# Altium PCB LMAT_AMT_V3.PcbDoc (part 1 of 2)
Units mil, origin at the board's own origin, x right, y up, seen from the top; angles counter-clockwise.
Board outline 1437.01 x 1604.33 mil, 4 copper layers (Top Layer, PWR, GND, Bottom Layer), stack 61.89 mil thick; 106 components, 51 nets, 250 pads, 150 vias.
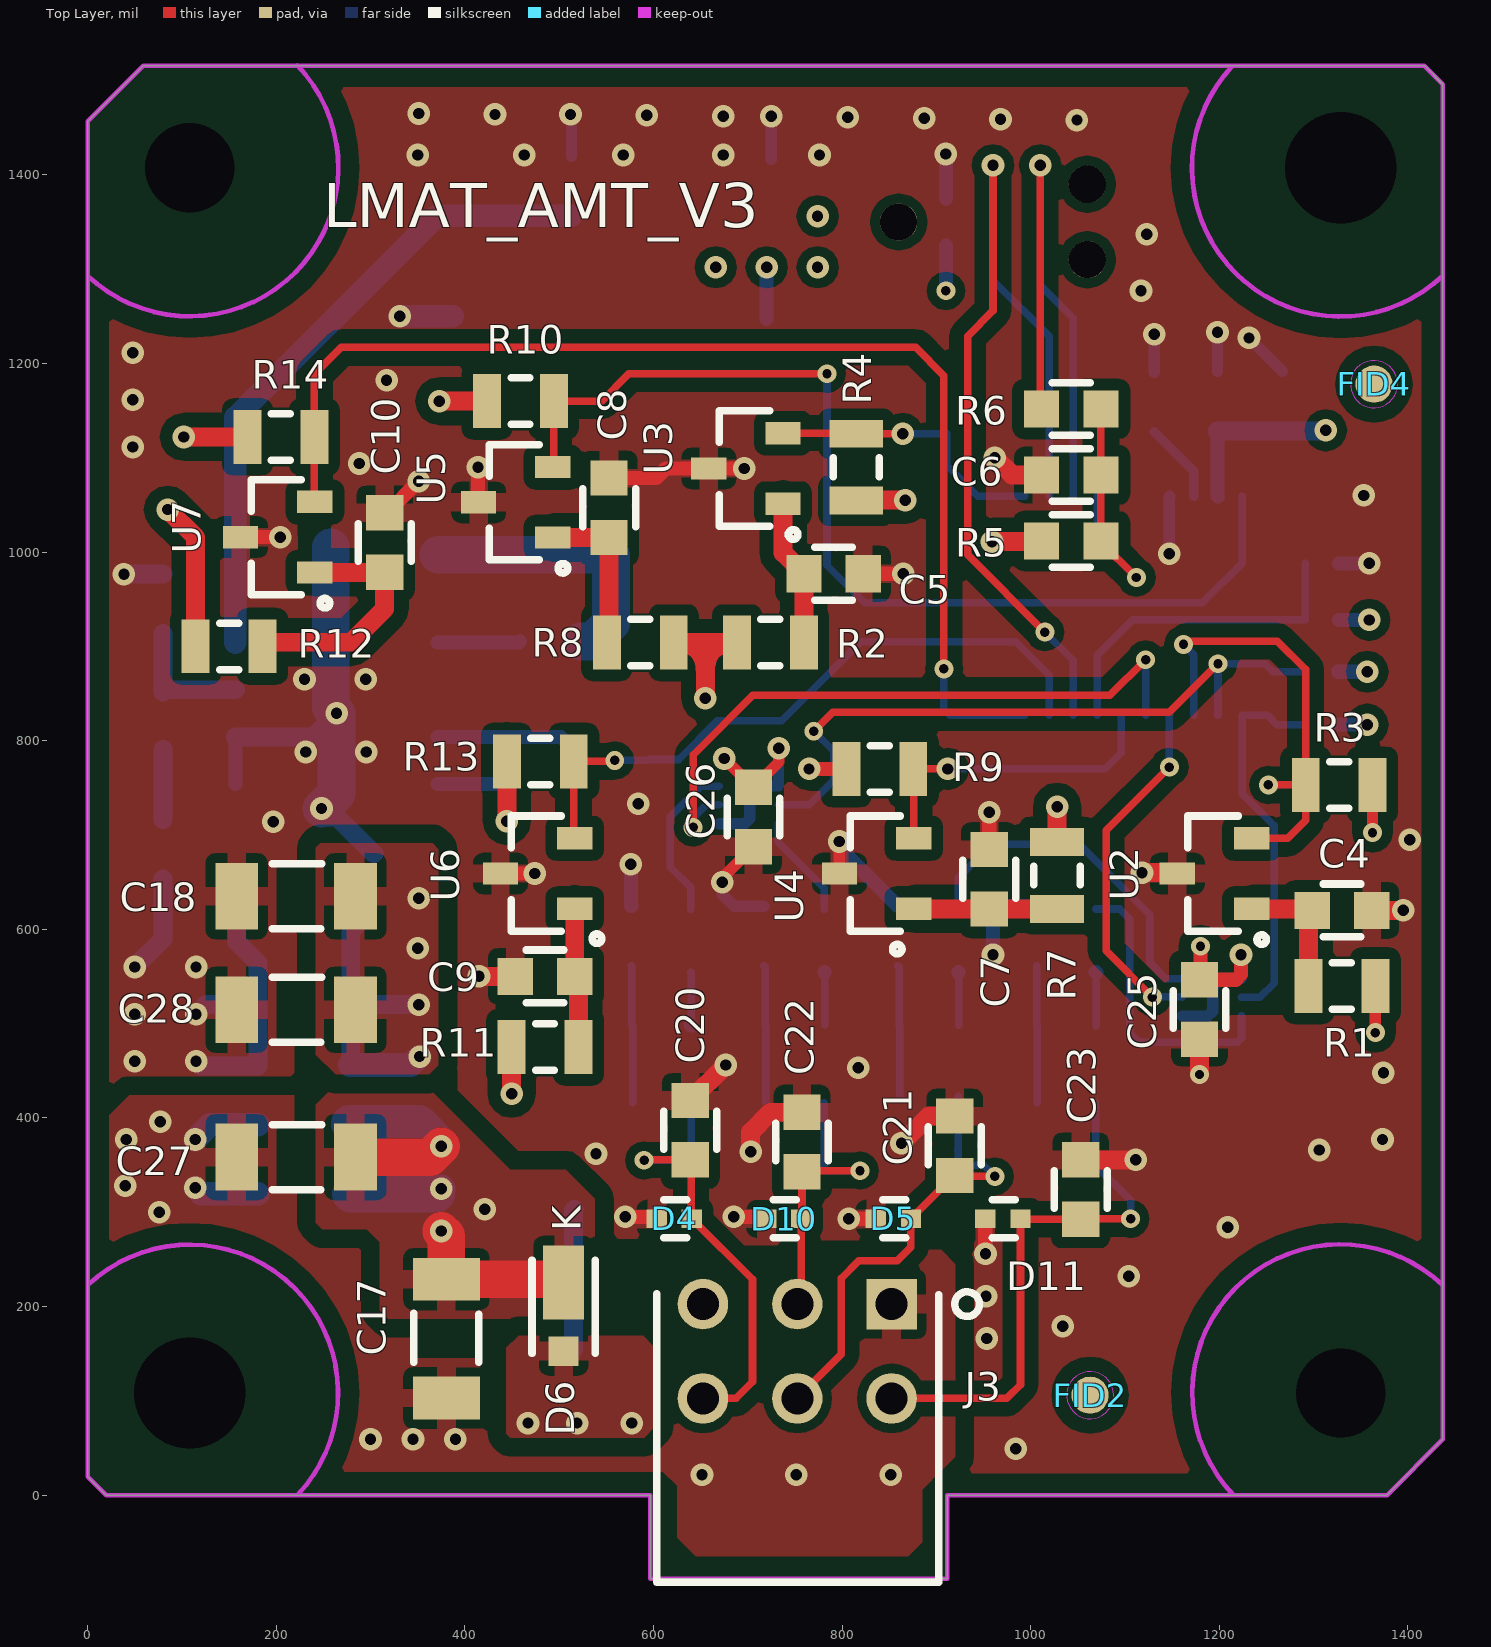
[diagram p0: Top Layer view]
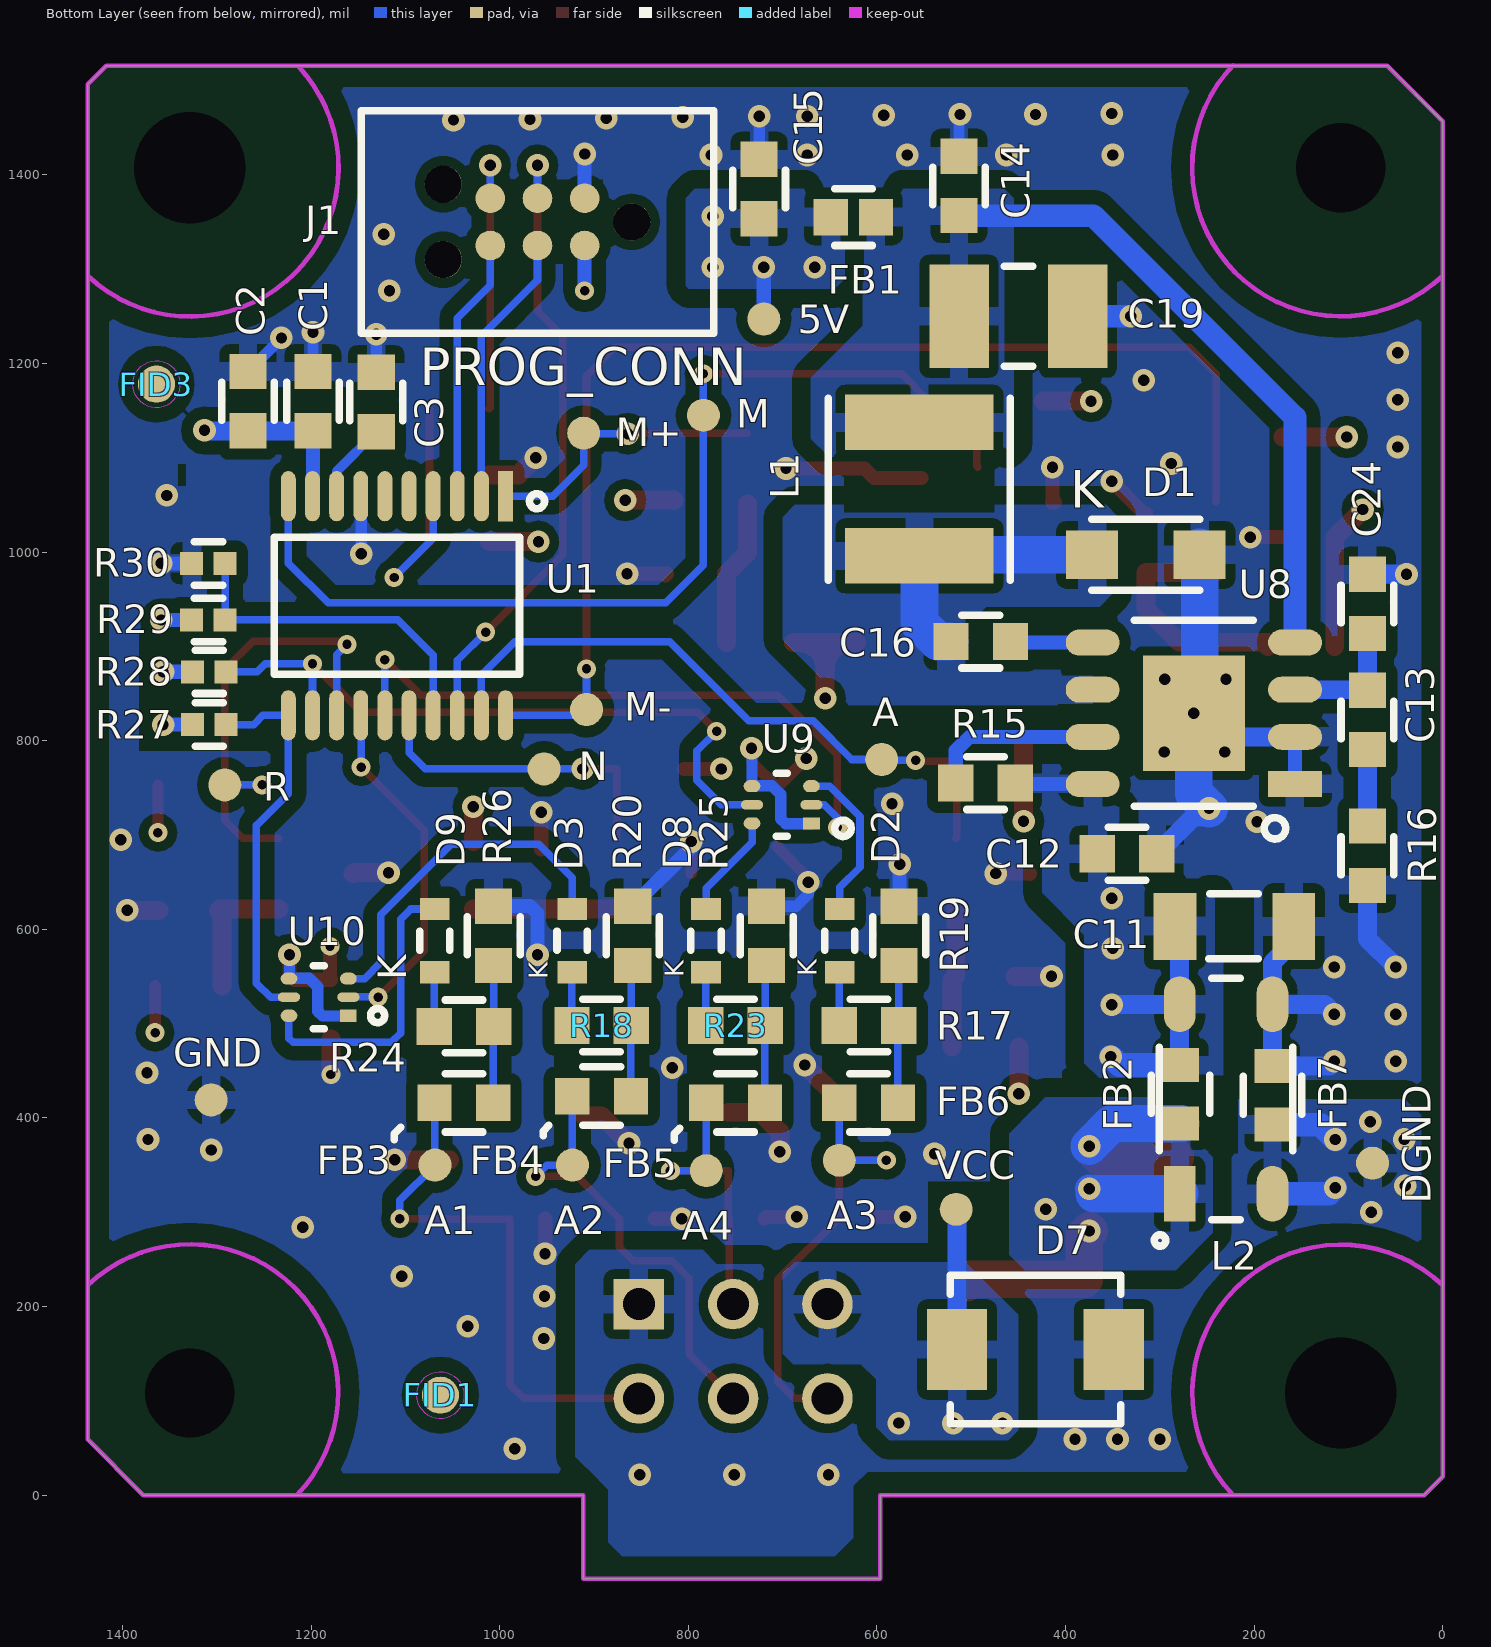
[diagram p1: Bottom Layer view, seen from below]
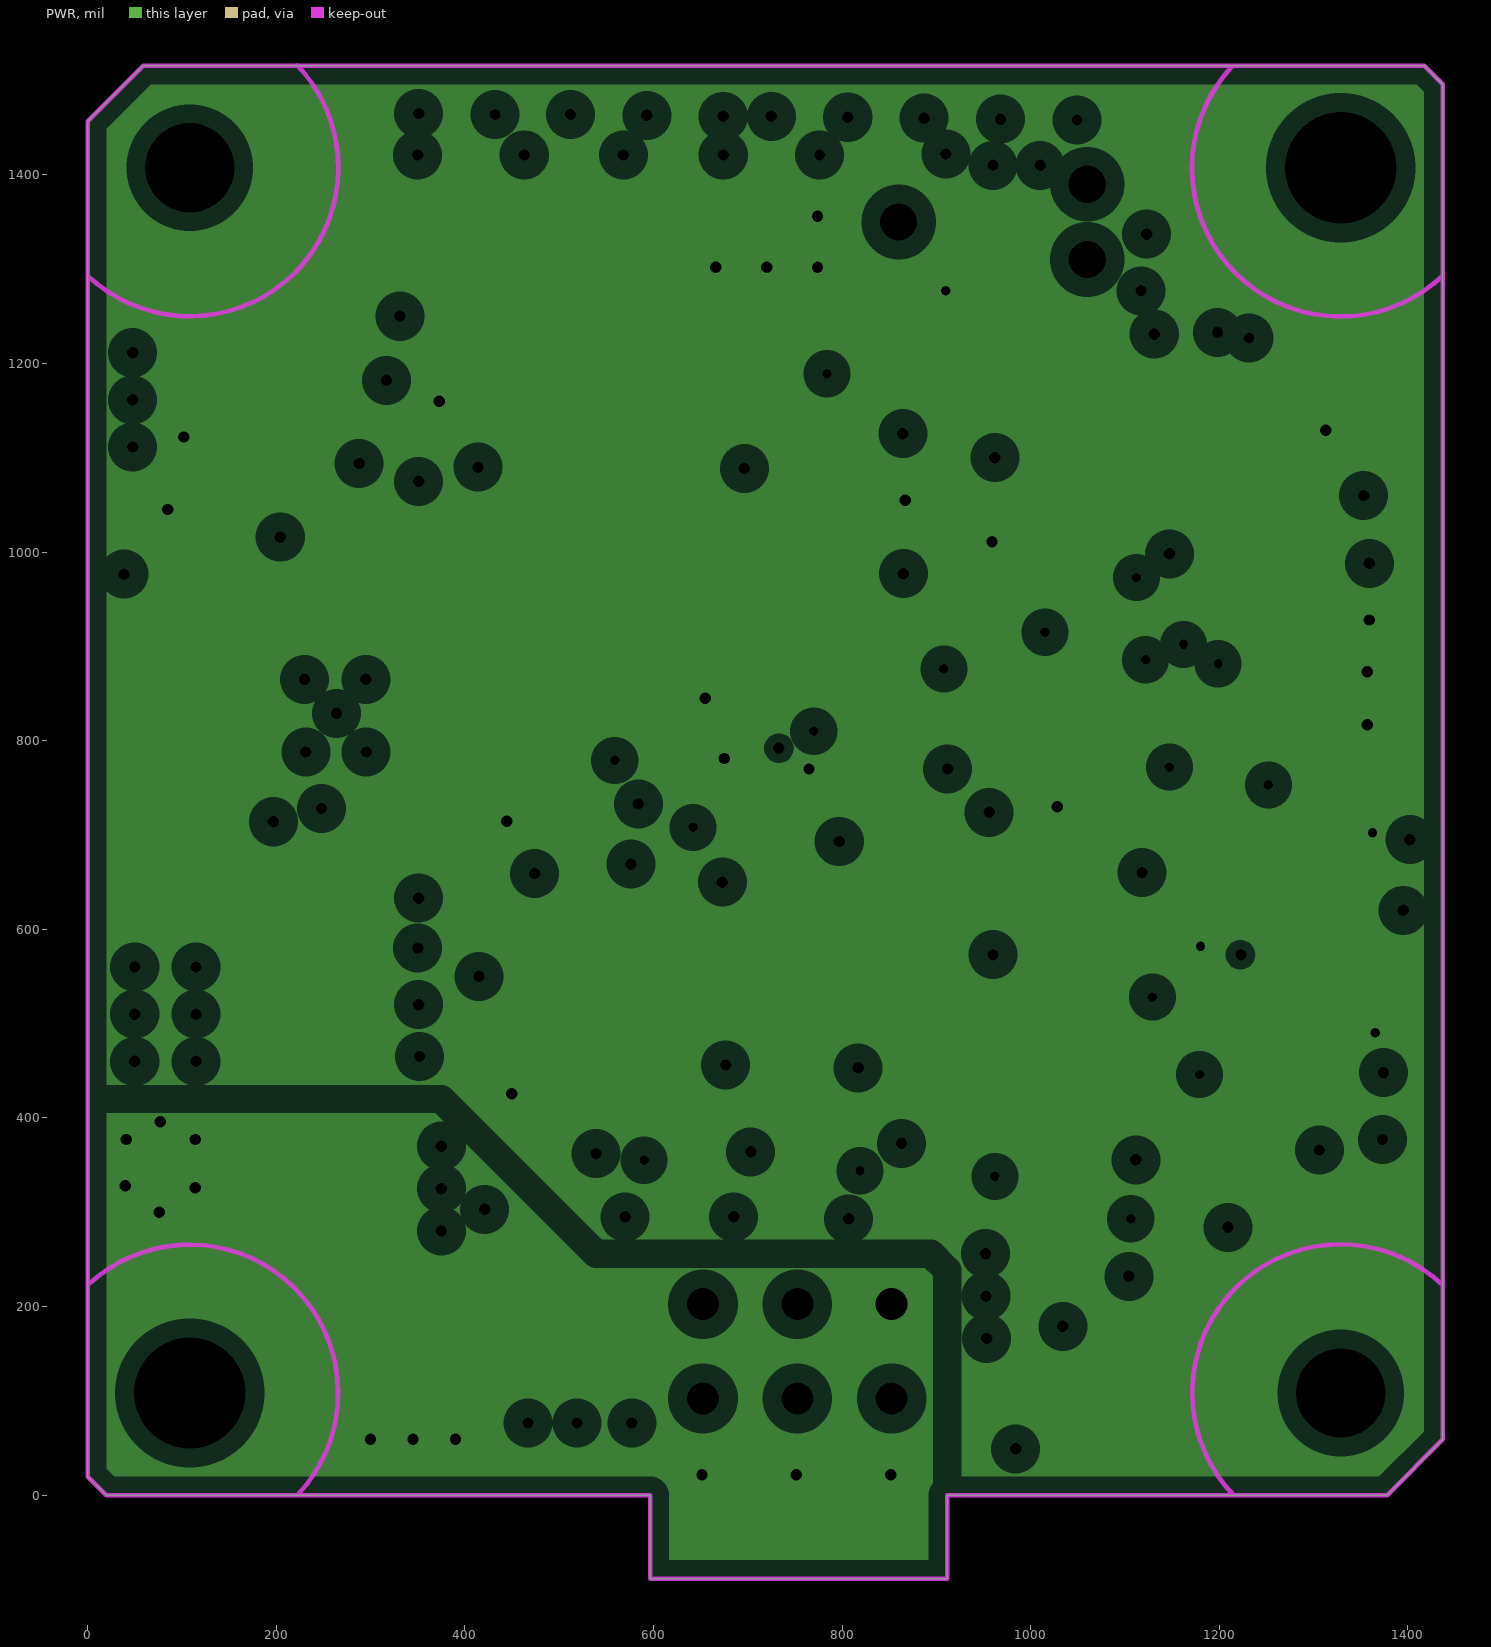
[diagram p2: PWR, clearances drawn from the general rule]
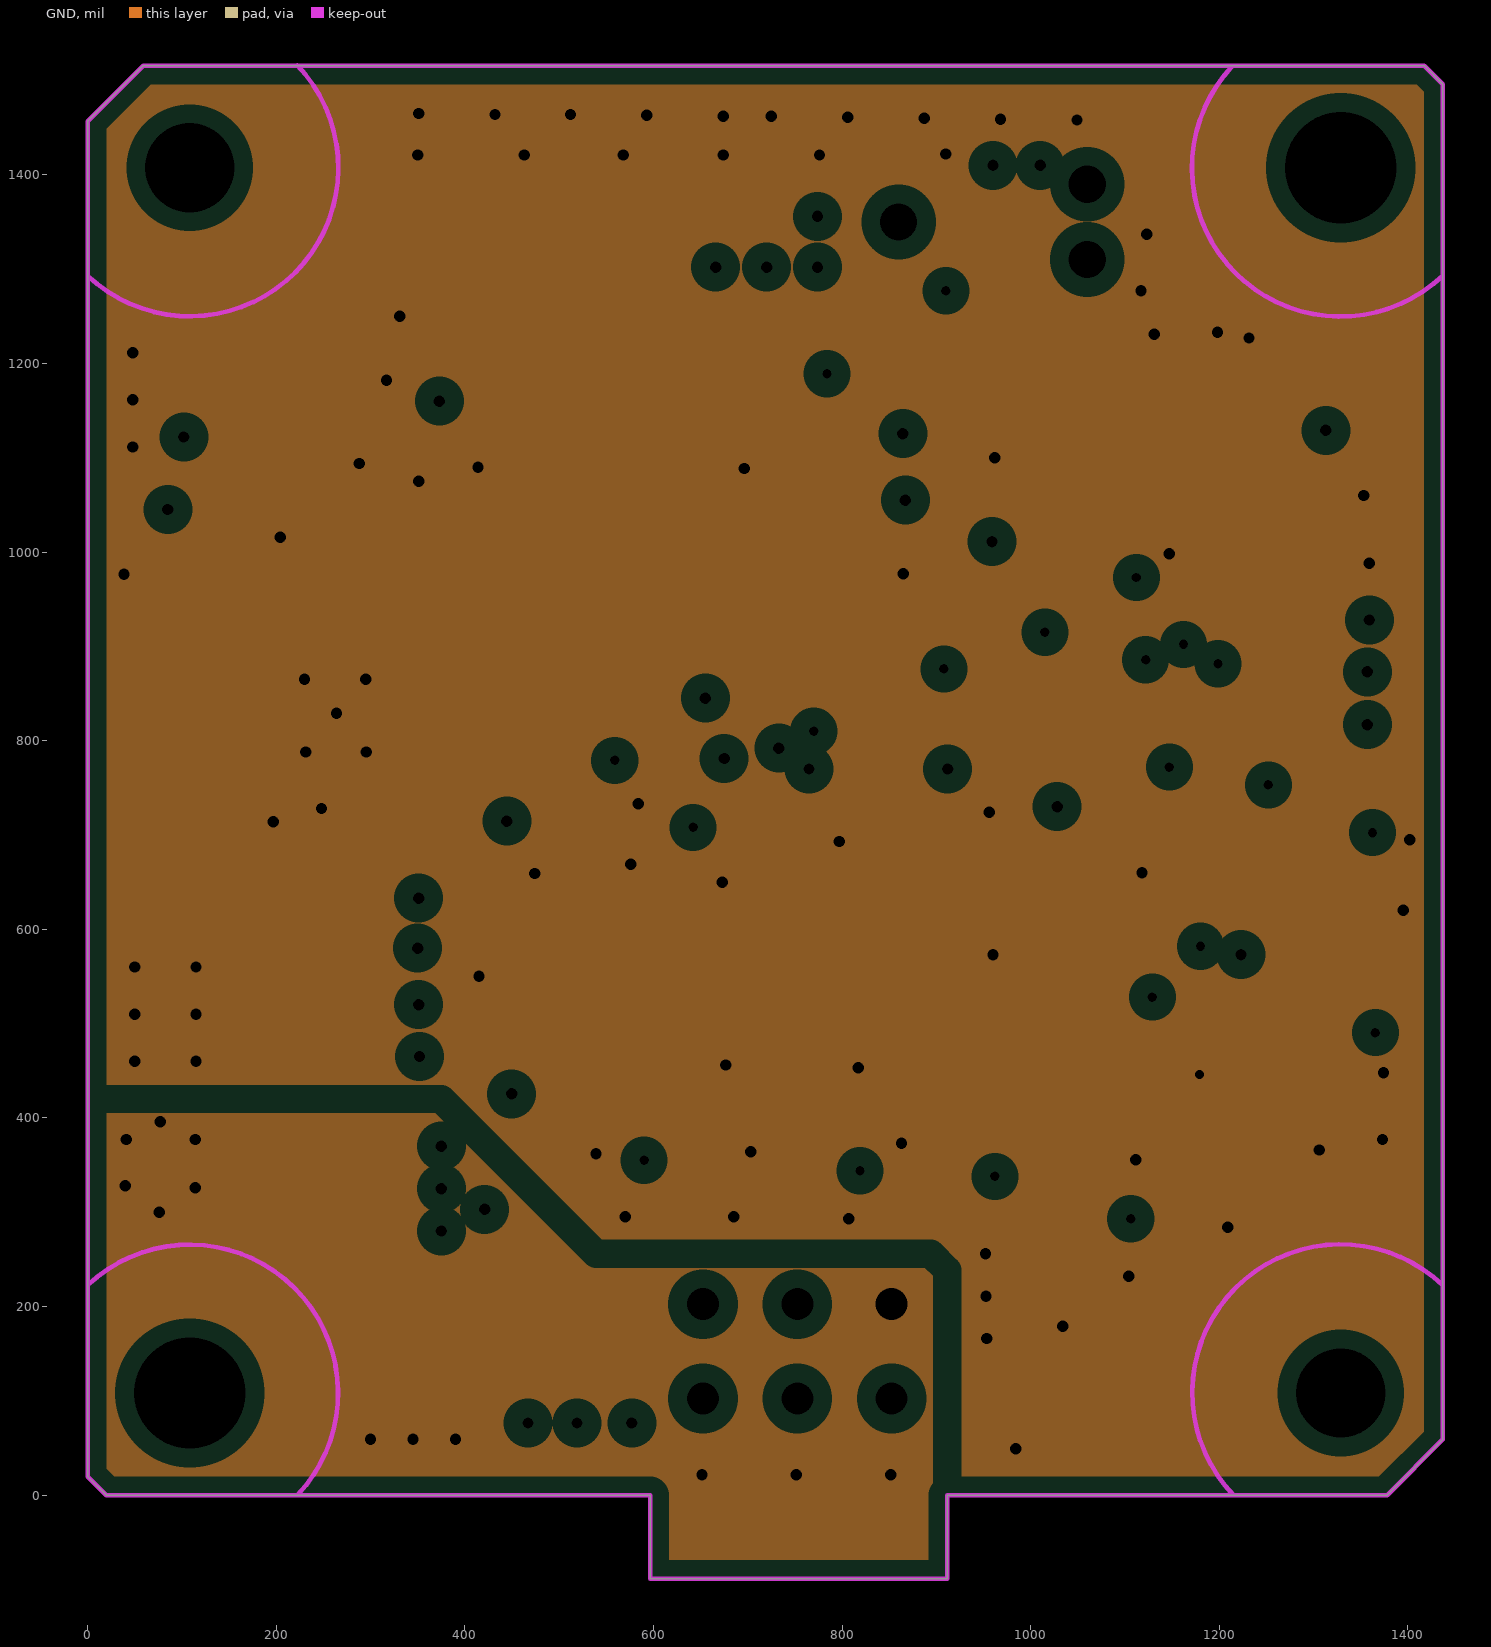
[diagram p3: GND, clearances drawn from the general rule]
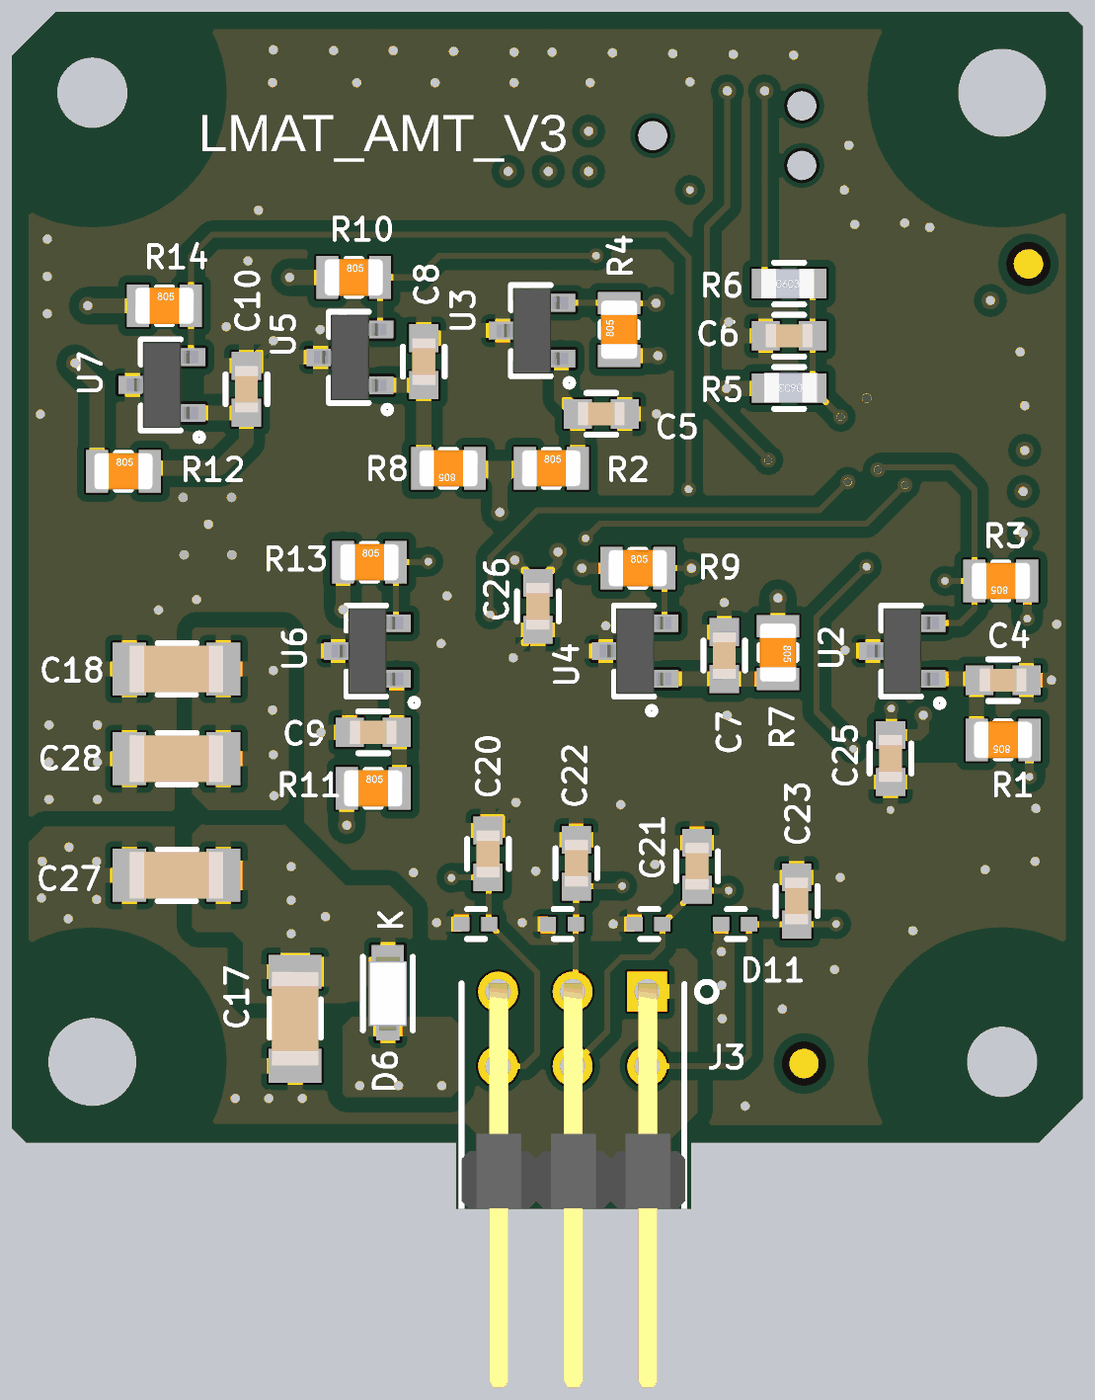
[diagram p5: 3D render of the assembled board from above, using the file's embedded part models]
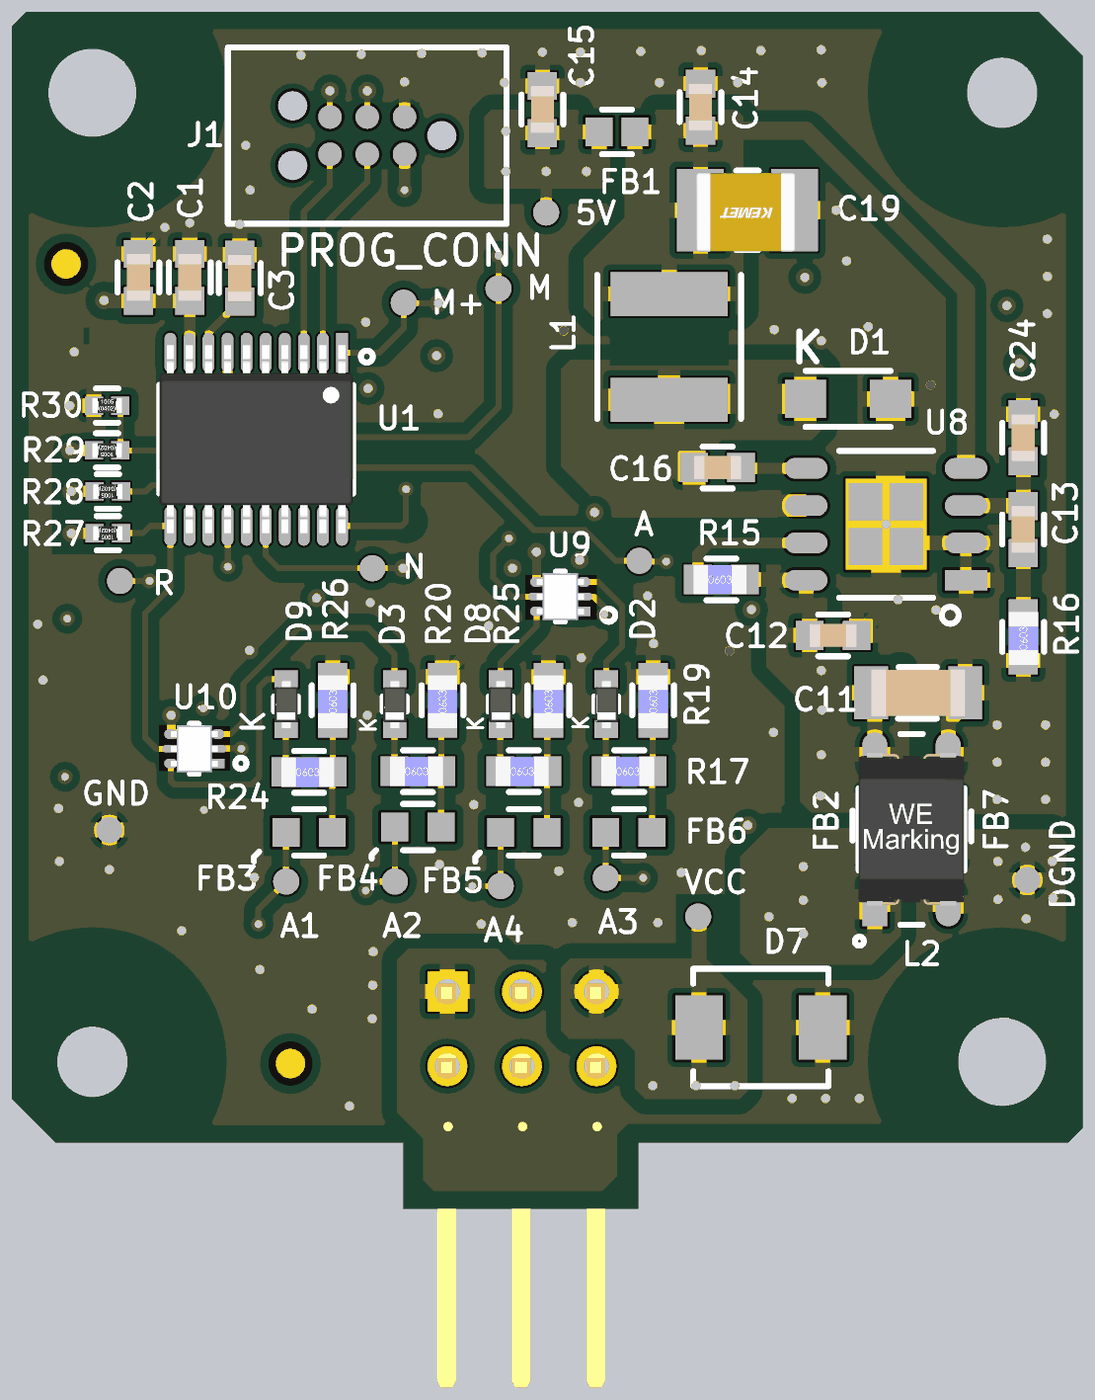
[diagram p6: 3D render of the assembled board from below, using the file's embedded part models]

## Layer stack, top to bottom
Top Solder: solder mask 0.787, Solder Resist, Dk 3.5
Top Layer: signal copper 1.378
Dielectric 1: prepreg 5.039, PP-006, Dk 4.2
Dielectric 2: prepreg 3.465, Dk 4.2
PWR: plane copper 1.378, net VCC_5V
Dielectric 3: core 39.37, FR-4, Dk 4.2
GND: plane copper 1.378, net GND
Dielectric 4: prepreg 3.465, PP-006, Dk 4.2
Dielectric 5: prepreg 5.039, Dk 4.2
Bottom Layer: signal copper 1.378
Bottom solder: solder mask 0.787, Solder Resist, Dk 3.5

## Board outline
0,19.68 19.68,0 596.46,0 596.46,-88.58 911.42,-88.58 911.42,0 1377.95,0 1437.01,59.05 1437.01,1496.06 1417.32,1515.75 59.06,1515.75 0,1456.69

## Design rules (kind name [scope] priority, off if disabled: settings)
AcuteAngle [All] p1: minimum=6.00000000000000E+0001 checktracksonly=TRUE
Clearance Clearance_keepout [(OnLayer('Keep-Out Layer'))] p1: gap=30 ignorepadtopadclearanceinfootprint=TRUE except(0: Arc-Text Arc-Hole Track-Text Track-Hole SMDPad-Text SMDPad-Hole THPad-Text THPad-Hole Via-Text Via-Hole Fill-Text Fill-Hole Poly-Text Poly-Hole Region-Text Region-Hole Text-Text Text-Hole; 10: Arc-Track Arc-SMDPad Arc-THPad Arc-Via Track-Track Track-SMDPad Track-THPad Track-Via SMDPad-Region; 15: Arc-Arc; 20: Arc-Poly Track-Poly; 25: Fill-Fill Poly-Poly)
Clearance [All] p2: gap=15 ignorepadtopadclearanceinfootprint=TRUE except(0: Arc-Hole Track-Hole SMDPad-Hole THPad-Hole Via-Hole Fill-Hole Poly-Hole Region-Hole Text-Hole; 8: Track-SMDPad SMDPad-Via; 10: Arc-Track Track-Track Track-Via Track-Region SMDPad-SMDPad SMDPad-Region THPad-Poly THPad-Region Via-Poly Via-Region; 12: SMDPad-Poly; 20: Poly-Poly)
ComponentClearance Choke [HasFootprint('EMS_744212331') vs HasFootprint('SMDL0603')] p1: gap=0 collisioncheckmode=3 verticalgap=0 showdistances=FALSE
ComponentClearance [All] p2: gap=20 collisioncheckmode=3 verticalgap=20 showdistances=FALSE
FanoutControl Fanout_Default [All] p1: bgadir=Out bgaviamode=Centered fanoutstyle=Auto fanoutdirection=Alternating viagrid=1 // Fanout_Default (Default Rule)
Height Bottom [All] p1: minheight=0 maxheight=216.54 prefheight=196.85
Height TOP [All] p2: minheight=0 maxheight=62.99 prefheight=59.06
Height [All] p3: minheight=0 maxheight=393.7 prefheight=196.85
HoleSize [All] p1: absolutevalues=TRUE maxlimit=1000 minlimit=1 maxpercent=80.000 minpercent=20.000
HoleToHoleClearance [All] p1 off: gap=10 allowstackedmicrovias=TRUE
LayerPairs [All] p1 off: enforce=TRUE
MinimumAnnularRing [All] p1: minimumring=5
MinimumSolderMaskSliver [All] p1: minsoldermaskwidth=3
PlaneClearance [All] p1: clearance=20
PlaneConnect [All] p1: planeconnectstyle=Direct reliefexpansion=20 reliefentries=4 reliefconductorwidth=10 reliefairgap=10
PolygonConnect C16_2 [IsNamedPolygon('NETC16_2_L04_P203')] p1: thpad.connectstyle=Relief thpad.reliefconductorwidth=10 thpad.reliefentries=4 thpad.polygonreliefangle="90 Angle" thpad.airgapwidth=10 smdpad.connectstyle=Relief smdpad.reliefconductorwidth=30 smdpad.reliefentries=4 smdpad.polygonreliefangle="90 Angle" smdpad.airgapwidth=10 via.connectstyle=Direct via.reliefconductorwidth=10 via.reliefentries=4 via.polygonreliefangle="90 Angle" via.airgapwidth=10
PolygonConnect PolygonConnect_Via [IsVia] p2: connectstyle=Direct reliefconductorwidth=10 reliefentries=4 polygonreliefangle="90 Angle" airgapwidth=10
PolygonConnect [All] p3: connectstyle=Relief reliefconductorwidth=20 reliefentries=4 polygonreliefangle="90 Angle" airgapwidth=10
RoutingVias [InNetClass('All Nets')and not InNetClass('PWR')] p1: holewidth=10 width=20 viastyle="Through Hole" minholewidth=10 minwidth=20 maxholewidth=20 maxwidth=40
RoutingVias RoutingVias_PWR [InNetClass('PWR')] p2: holewidth=12 width=24 viastyle="Through Hole" minholewidth=10 minwidth=20 maxholewidth=12 maxwidth=24
SilkToSilkClearance [All] p1: silktosilkclearance=3
SilkToSolderMaskClearance FB [HasFootprint('SMDL0603')] p1: minsilkscreentomaskgap=0 clearancetoexposedcopper=TRUE
SilkToSolderMaskClearance [IsPad] p2: minsilkscreentomaskgap=3 clearancetoexposedcopper=TRUE
SolderMaskExpansion [All] p1: expansion=4
UnpouredPolygon [All] p1: allowunpoured=TRUE allowshelved=TRUE
Width Width_PWR [InNetClass('PWR')] p1: maxlimit=50 minlimit=12 preferedwidth=15
Width [All] p2: maxlimit=200 minlimit=8 preferedwidth=15
14 further rules are at their usual default settings.

## Components (designator, comment, footprint, x,y, rotation, side; value= is the part's Value field where it differs from the comment)
5V "Test Point- 35mil" TP_35M_DIA#1 720,1247 r180 bottom locked
A "Test Point- 35mil" TP_35M_DIA#2 937.5,1093.58 r180 bottom locked
A1 "Test Point- 35mil" TP_35M_DIA#1 1068.65,350 r180 bottom locked
A2 "Test Point- 35mil" TP_35M_DIA#1 922.91,350 r180 bottom locked
A3 "Test Point- 35mil" TP_35M_DIA#1 640,355 r180 bottom locked
A4 "Test Point- 35mil" TP_35M_DIA#1 781,344 r180 bottom
C1 "CAP CER 0.1UF 50V 10% X7R 0603" SMDC0603 1198,1160 r90 bottom locked value=0.1uF
C2 "CAP CER 1UF 25V X7R 0603" SMDC0603 1267,1160 r270 bottom locked value=1µF
C3 "CAP CER 1UF 25V X7R 0603" SMDC0603 1131,1159 r90 bottom locked value=1µF
C4 "CAP CER 0.047UF 50V X7R 0603" SMDC0603 1330,620 r180 top locked value=0.047µF
C5 "CAP CER 0.047UF 50V X7R 0603" SMDC0603 791,977 r180 top locked value=0.047µF
C6 "CAP CER 0.1UF 50V 10% X7R 0603" SMDC0603 1043,1081.69 r180 top locked value=0.1uF
C7 "CAP CER 0.047UF 50V X7R 0603" SMDC0603 956,653 r270 top locked value=0.047µF
C8 "CAP CER 0.047UF 50V X7R 0603" SMDC0603 553,1047 r270 top locked value=0.047µF
C9 "CAP CER 0.047UF 50V X7R 0603" SMDC0603 485,550 r0 top locked value=0.047µF
C10 "CAP CER 0.047UF 50V X7R 0603" SMDC0603 315,1010 r270 top locked value=0.047µF
C11 "CAP CER 10UF 35V X7R 1206" SMDC1206 221,603 r0 bottom locked value=10uF
C12 "CAP CER 0.1UF 50V 10% X7R 0603" SMDC0603 335,680 r180 bottom locked value=0.1uF
C13 "CAP CER 0.022UF 50V 10% X7R 0603" SMDC0603 80,822 r270 bottom locked value=0.022uF
C14 "CAP CER 0.22UF 50V X7R 0603" SMDC0603 513,1388.2 r270 bottom locked value=0.22µF
C15 "CAP CER 0.1UF 50V 10% X7R 0603" SMDC0603 725,1385 r90 bottom locked value=0.1uF
C16 "CAP CER 0.22UF 50V X7R 0603" SMDC0603 490,905 r0 bottom locked value=0.22µF
C17 "CAP CER 10UF 35V X7R 1206" SMDC1206 380.37,166 r90 top locked value=10uF
C18 "CAP CER 10UF 35V X7R 1206" SMDC1206 221,635 r0 top locked value=10uF
C19 "CAP CER 47UF 16V X6S 1210" SMDC1210 450,1250 r0 bottom locked value=47uF
C20 "CAP CER 10000PF 50V X8R 0603" SMDC0603 639,387 r270 top locked value=DNP
C21 "CAP CER 10000PF 50V X8R 0603" SMDC0603 919.48,370.49 r270 top locked value=DNP
C22 "CAP CER 10000PF 50V X8R 0603" SMDC0603 757.5,374.49 r270 top value=DNP
C23 "CAP CER 10000PF 50V X8R 0603" SMDC0603 1053,324 r270 top locked value=DNP
C24 "CAP CER 0.022UF 50V 10% X7R 0603" SMDC0603 80,945 r90 bottom locked value=DNP
C25 "CAP CER 0.1UF 50V 10% X7R 0603" SMDC0603 1179,515 r270 top locked value=0.1uF
C26 "CAP CER 0.1UF 50V 10% X7R 0603" SMDC0603 706,719 r270 top locked value=0.1uF
C27 "CAP CER 10UF 35V X7R 1206" SMDC1206 220.98,358.39 r0 top locked value=10uF
C28 "CAP CER 10UF 35V X7R 1206" SMDC1206 221,514.68 r0 top locked value=10uF
D1 "DIODE SCHOTTKY 40V 1A DO-219AB" SODFL370X110-2N 315,997 r180 bottom locked value=SS1FL4HM3/H
D2 "Diode Schottky 30V 100mA Surface Mount EMD2" SOD1700X70N-V2 639.5,588 r90 bottom locked value=RB501SM-30FHT2R
D3 "Diode Schottky 30V 100mA Surface Mount EMD2" SOD1700X70N-V2 923.28,588 r90 bottom locked value=RB501SM-30FHT2R
D4 "TVS DIODE 5V 17.5V SOD882T" SOD1510X40 622.01,293 r0 top locked value=ESDALC5-1BT2Y
D5 "TVS DIODE 5V 17.5V SOD882T" SOD1510X40 854.33,293 r0 top locked value=ESDALC5-1BT2Y
D6 "DIODE SCHOTTKY 150V 1A MICROSMP" "MICROSMP (DO-219AD)" 504.68,188.96 r270 top locked value=V1PM15HM3/H
D7 "TVS DIODE 23.1V 48.3V SMB" DIOM4336X26B 432.01,154.37 r0 bottom locked value=SM6T27CAY
D8 "Diode Schottky 30V 100mA Surface Mount EMD2" SOD1700X70N-V2 781.28,588 r90 bottom locked value=RB501SM-30FHT2R
D9 "Diode Schottky 30V 100mA Surface Mount EMD2" SOD1700X70N-V2 1069,588 r90 bottom locked value=RB501SM-30FHT2R
D10 "TVS DIODE 5V 17.5V SOD882T" SOD1510X40 738.17,293 r0 top locked value=ESDALC5-1BT2Y
D11 "TVS DIODE 5V 17.5V SOD882T" SOD1510X40 970.48,293 r0 top locked value=ESDALC5-1BT2Y
DGND "Test Point- 35mil" TP_35M_DIA#1 74.5,352 r90 bottom locked
FB1 "FERRITE BEAD 600 OHM 0603 1LN" SMDL0603#1 625,1355 r0 bottom locked value="600 Ohms"
FB2 "FERRITE BEAD 600 OHM 0603 1LN" SMDL0603#2 278.01,425 r90 bottom locked value=DNP
FB3 "FERRITE BEAD 600 OHM 0603 1LN" SMDL0603#2 1037.98,416 r0 bottom locked value="600 Ohms"
FB4 "FERRITE BEAD 600 OHM 0603 1LN" SMDL0603#2 892,423 r0 bottom locked value="600 Ohms"
FB5 "FERRITE BEAD 600 OHM 0603 1LN" SMDL0603#2 750,416 r0 bottom locked value="600 Ohms"
FB6 "FERRITE BEAD 600 OHM 0603 1LN" SMDL0603#2 609,416 r0 bottom locked value="600 Ohms"
FB7 "FERRITE BEAD 600 OHM 0603 1LN" SMDL0603#2 180.67,424 r90 bottom locked value=DNP
FID1 "FID40X40" FID40X40 1062.99,105.98 r90 bottom locked
FID2 "FID40X40" FID40X40 1062.99,105.98 r90 top locked
FID3 "FID40X40" FID40X40 1364.02,1177.99 r90 bottom locked
FID4 "FID40X40" FID40X40 1364.02,1177.99 r90 top locked
GND "Test Point- 35mil" TP_35M_DIA#1 1306,419 r90 bottom locked
J1 "J-LINK 6-PIN NEEDLE ADAPTER" "PRG_8.06.16 J-LINK 6-PIN NEEDLE ADAPTER" 960,1350 r0 bottom locked value="8.06.16 J-LINK 6-PIN NEEDLE ADAPTER"
J3 "CONN HEADER R/A 6POS 2.54MM" HDRRA6W86P254_2X3_1344X254X528P_Modified 752.5,152.5 r180 top locked value=M20-9950345
L1 "FIXED IND 47UH 700MA 422.5 MOHM" INDC4949X310N 555,1066.79 r90 bottom locked value=47UH
L2 "CMC 330UH 300MA 2LN 2 KOHM SMD" EMS_744212331 229.87,420 r270 bottom locked value=744212331
M "Test Point- 35mil" TP_35M_DIA#1 784,1145 r90 bottom locked
M+ "Test Point- 35mil" TP_35M_DIA#3 566,811 r90 bottom locked
M- "Test Point- 35mil" TP_35M_DIA#4 1853,433 r90 bottom locked
N "Test Point- 35mil" TP_35M_DIA#1 953,770 r90 bottom locked
R "Test Point- 35mil" TP_35M_DIA#5 341.57,1153 r180 bottom locked
R1 "RES SMD 100 OHM 1% 1/2W 0805" SMDR0805 1330,540 r180 top locked value=100R
R2 "RES SMD 100 OHM 1% 1/2W 0805" SMDR0805 724,904 r0 top locked value=100R
R3 "RES SMD 1.2K OHM 5% 1/2W 0805" SMDR0805 1327,753 r180 top locked value=1.2K
R4 "RES SMD 1.2K OHM 5% 1/2W 0805" SMDR0805 815,1090 r90 top locked value=1.2K
R5 "RES SMD 47K OHM 1% 1/10W 0603" SMDR0603 1043,1011.69 r180 top locked value=47K
R6 "RES SMD 0.0OHM JUMPER 1/10W 0603" SMDR0603 1043,1151.69 r0 top locked value=0R
R7 "RES SMD 100 OHM 1% 1/2W 0805" SMDR0805 1028,657 r270 top locked value=100R
R8 "RES SMD 100 OHM 1% 1/2W 0805" SMDR0805 586,904 r180 top locked value=100R
R9 "RES SMD 1.2K OHM 5% 1/2W 0805" SMDR0805 840,770 r0 top locked value=1.2K
R10 "RES SMD 1.2K OHM 5% 1/2W 0805" SMDR0805 459,1160 r0 top locked value=1.2K
R11 "RES SMD 100 OHM 1% 1/2W 0805" SMDR0805 485,475 r0 top locked value=100R
R12 "RES SMD 100 OHM 1% 1/2W 0805" SMDR0805 150,900 r0 top locked value=100R
R13 "RES SMD 1.2K OHM 5% 1/2W 0805" SMDR0805 480,778 r0 top locked value=1.2K
R14 "RES SMD 1.2K OHM 5% 1/2W 0805" SMDR0805 205,1122 r0 top locked value=1.2K
R15 "RES SMD 1M OHM 5% 1/10W 0603" SMDR0603 485,755 r180 bottom locked value=1M
R16 "RES SMD 22K OHM 1% 1/10W 0603" SMDR0603 80,678 r90 bottom locked value=22K
R17 "RES SMD 105 OHM 1% 1/10W 0603" SMDR0603 608.5,498 r180 bottom locked value="105 Ohms"
R18 "RES SMD 105 OHM 1% 1/10W 0603" SMDR0603 892.02,498 r180 bottom locked value="105 Ohms"
R19 "RES SMD 210 OHM 1% 1/10W 0603" SMDR0603 576.5,593 r90 bottom locked value="210 Ohms"
R20 "RES SMD 210 OHM 1% 1/10W 0603" SMDR0603 859,593 r90 bottom locked value="210 Ohms"
R23 "RES SMD 105 OHM 1% 1/10W 0603" SMDR0603 750.02,498 r180 bottom locked value="105 Ohms"
R24 "RES SMD 105 OHM 1% 1/10W 0603" SMDR0603 1038,497 r180 bottom locked value="105 Ohms"
R25 "RES SMD 210 OHM 1% 1/10W 0603" SMDR0603 717,593 r90 bottom locked value="210 Ohms"
R26 "RES SMD 210 OHM 1% 1/10W 0603" SMDR0603 1006.49,593 r90 bottom locked value="210 Ohms"
R27 "RES SMD 10K OHM 5% 1/10W 0402" SMDR0402 1308,817 r0 bottom locked value=10K
R28 "RES SMD 10K OHM 5% 1/10W 0402" SMDR0402 1308,873 r0 bottom locked value=10K
R29 "RES SMD 4.7K OHM 1% 1/10W 0402" SMDR0402 1309,928 r0 bottom locked value=4.7K
R30 "RES SMD 4.7K OHM 1% 1/10W 0402" SMDR0402 1309,988 r180 bottom locked value=DNP
U1 "IC MCU 8BIT 8KB FLASH 20TSSOP" SOP65P640X120-20N 1109,943 r270 bottom locked value=STM8AF6223PCU
U2 "MAGNETIC SWITCH UNIPOLAR SOT23-3" SOT95P248X115-3N 1194.88,659.06 r180 top locked value=TLE49641MXTSA1
U3 "MAGNETIC SWITCH UNIPOLAR SOT23-3" SOT95P248X115-3N 698.03,1088.58 r180 top locked value=TLE49641MXTSA1
U4 "MAGNETIC SWITCH UNIPOLAR SOT23-3" SOT95P248X115-3N 836.61,659.06 r180 top locked value=TLE49641MXTSA1
U5 "MAGNETIC SWITCH UNIPOLAR SOT23-3" SOT95P248X115-3N 453.94,1052.76 r180 top locked value=TLE49641MXTSA1
U6 "MAGNETIC SWITCH UNIPOLAR SOT23-3" SOT95P248X115-3N 477.17,659.06 r180 top locked value=TLE49641MXTSA1
U7 "MAGNETIC SWITCH UNIPOLAR SOT23-3" SOT95P248X115-3N 201.57,1015.75 r180 top locked value=TLE49641MXTSA1
U8 "IC REG BUCK 5V 1.8A 8DSO" SOIC127P600X170_HS-9N 264,829 r0 bottom locked value=TLE8366EV50XUMA1
U9 "MOSFET 2P-CH 20V 0.55A SOT666" SOTFL50P160X60-6N 701,732 r0 bottom locked value=PMDT670UPE,115
U10 "MOSFET 2P-CH 20V 0.55A SOT666" SOTFL50P160X60-6N 1192,528 r0 bottom locked value=PMDT670UPE,115
VCC "Test Point- 35mil" TP_35M_DIA#1 516,303 r90 bottom locked

## Footprints (in the part's own frame and the unit in brackets; to place one, negate y for a bottom-side part, rotate by r counter-clockwise, add the part's x,y. Pads: shape width x height; smd on the part's side, far side on the other; paste and mask are expansions set on the pad)
DIOM4336X26B [mm] "Molded Diode, 2-Leads, Body 4.32x3.63mm, IPC Low Density"
  rect 1.62x2.18 smd: 1(-2.11,0) 2(2.11,0)
  silkscreen extent -2.3,-2 2.3,2, body extent -2.52,-1.97 2.52,1.97, height 2.65
EMS_744212331 [mm]
  rect 1.5x0.85 smd mask+0.102: 1(2.55,-1.25)
  oval 1.5x0.85 smd mask+0.102: 3(2.55,1.25) 4(-2.55,1.25) 5(-2.55,-1.25)
  silkscreen extent -3.25,-1.93 3.96,1.8, body extent -2.6,-1.8 2.6,1.8, height 1.7
FID40X40 [mm]
  round 1 smd paste-2 mask+0.254: 0(0,0)
  Top Layer keep-out circle w0.025: c0,0 r0.635
HDRRA6W86P254_2X3_1344X254X528P_Modified [mm] "CONN HEADER R/A 6POS 2.54MM"
  rect 1.36x1.36 hole 0.86 mask+0.076: 1(-2.54,-1.27)
  round 1.36 hole 0.86 mask+0.076: 2(0,-1.27) 3(2.54,-1.27) 4(-2.54,1.27) 5(0,1.27) 6(2.54,1.27)
  silkscreen extent -4.9,-1.6 3.78,6.22, body extent -3.84,-1.55 3.78,12.21, height 5.08
INDC4949X310N [mm] "NRS5030T2R2NMGJ,FIXED IND 6.8UH 2.3A 52 MOHM SMD"
  rect 1.5x4 smd mask+0.076: 1(-1.8,0) 2(1.8,0)
  Top Layer pour cut-out: -0.635,2.032 0.635,2.032 0.635,-2.032 -0.635,-2.032
  silkscreen extent -2.45,-2.45 2.45,2.45, body extent -2.45,-2.45 2.45,2.45, height 3.1
"MICROSMP (DO-219AD)" [mm] "DIODE SCHOTTKY 150V 1A MICROSMP"
  rect 2x1.1 smd: 1(-0.925,0)
  rect 0.8x0.8 smd: 2(0.925,0)
  silkscreen extent -1.52,-0.85 0.98,0.85, body extent -1.53,-0.65 0.98,0.65, height 0.69
"PRG_8.06.16 J-LINK 6-PIN NEEDLE ADAPTER" [mm]
  round 1 hole 1 unplated: 0(-2.54,0) 0(2.54,1.016) 0(2.54,-1.016)
  round 0.8 smd: 1(-1.27,-0.635) 2(-1.27,0.635) 3(0,-0.635) 4(0,0.635) 5(1.27,-0.635) 6(1.27,0.635)
  Top Layer pour cut-out: -1.778,-1.143 -1.778,1.143 1.778,1.143 1.778,-1.143
  silkscreen extent -4.75,-3 4.75,3
SMDC0603 [mm]
  rect 0.95x1 smd mask+0.076: 1(-0.8,0) 2(0.8,0)
  Top Layer pour cut-out: -0.203,0.559 -0.203,-0.584 0.203,-0.584 0.203,0.559
  silkscreen extent -0.51,-0.71 0.51,0.71, body extent -0.8,-0.4 0.8,0.4, height 0.81
SMDC1206 [mm]
  rect 1.15x1.8 smd mask+0.076: 1(-1.6,0) 2(1.6,0)
  Top Layer pour cut-out: -0.533,0.889 0.533,0.889 0.533,-0.914 -0.533,-0.914
  silkscreen extent -0.64,-0.87 0.69,0.87, body extent -1.6,-0.8 1.6,0.8, height 0.79
SMDC1210 [mm] "GRM32ER71A476KE15L, CAP CER 47UF 10V X7R 1210"
  rect 1.6x2.8 smd mask+0.076: 1(-1.6,0) 2(1.6,0)
  Top Layer pour cut-out: -0.508,1.35 0.381,1.35 0.381,-1.35 -0.508,-1.35
  silkscreen extent -0.38,-1.35 0.38,1.35, body extent -1.65,-1.29 1.75,1.41, height 1.41
SMDL0603#1 [mm] "Chip Inductor, 2-Leads, Body 1.60x0.80mm, IPC Medium Density"
  rect 0.92x0.98 smd: 1(-0.61,0) 2(0.61,0)
  silkscreen extent -0.51,-0.76 0.51,0.76, body extent -0.87,-0.48 0.87,0.48, height 1
SMDL0603#2 [mm] "Chip Inductor, 2-Leads, Body 1.60x0.80mm, IPC Medium Density"
  rect 0.92x0.98 smd: 1(-0.79,0) 2(0.79,0)
  silkscreen extent -0.51,-0.79 0.51,0.79, body extent -0.87,-0.48 0.87,0.48, height 1
SMDR0402 [mm]
  rect 0.62x0.62 smd mask+0.076: 1(-0.45,0) 2(0.45,0)
  Top Layer pour cut-out: -0.102,0.381 0.076,0.381 0.076,-0.381 -0.102,-0.381
  silkscreen extent -0.38,-0.58 0.38,0.58, body extent -0.5,-0.25 0.5,0.25, height 0.35
SMDR0603 [mm]
  rect 0.95x1 smd mask+0.076: 1(-0.8,0) 2(0.8,0)
  Top Layer pour cut-out: -0.254,0.61 0.254,0.61 0.254,-0.61 -0.254,-0.61
  silkscreen extent -0.51,-0.71 0.51,0.71, body extent -0.95,-0.5 0.85,0.5, height 0.32
SMDR0805 [mm]
  rect 0.75x1.45 smd mask+0.076: 1(-0.9,0) 2(0.9,0)
  Top Layer pour cut-out: -0.381,0.787 0.406,0.787 0.406,-0.762 0.381,-0.787 -0.381,-0.787
  silkscreen extent -0.25,-0.63 0.25,0.63, body extent -1,-0.62 1,0.63, height 0.78
SOD1510X40 [mm]
  rect 0.55x0.5 smd mask+0.076: 1(-0.475,0) 2(0.475,0)
  silkscreen extent -0.28,-0.51 0.33,0.51, body extent -0.53,-0.32 0.53,0.32, height 0.4
SOD1700X70N-V2 [mm]
  rect 0.6x0.8 smd mask+0.076: 1(-0.85,0) 2(0.85,0)
  silkscreen extent -0.25,-0.41 0.25,0.41, body extent -0.82,-0.41 0.78,0.39, height 0.7
SODFL370X110-2N [mm] "SODFL, 2-Leads, Body 1.80x3.70mm, IPC Medium Density"
  rect 1.4x1.3 smd: 1(1.45,0) 2(-1.45,0)
  Top Layer pour cut-out: -0.395,-0.95 -0.395,0.95 0.316,0.95 0.316,-0.95
  silkscreen extent -1.45,-0.96 1.45,0.96, body extent -1.85,-0.95 1.85,0.95, height 1.1
SOIC127P600X170_HS-9N [mm] "SOIC, 8-Leads, Body 4.90x3.90mm, Pitch 1.27mm, Thermal Pad 3.10x2.75mm, IPC Medium Density"
  rect 1.45x0.7 smd: 1(-2.725,1.905)
  oval 1.45x0.7 smd: 2(-2.725,0.635) 3(-2.725,-0.635) 4(-2.725,-1.905) 5(2.725,-1.905) 6(2.725,-0.635) 7(2.725,0.635) 8(2.725,1.905)
  rect 2.75x3.1 smd paste-3 mask+0.102: 9(0,0)
  silkscreen extent -2.47,-2.5 1.6,3.39, body extent -3,-2.5 3,2.5, height 1.7
SOP65P640X120-20N [mm] "TSOP, 20-Leads, Body 6.50x4.40mm, Pitch 0.65mm, IPC Medium Density"
  rect 1.35x0.4 smd mask+0.076: 1(-2.95,2.925)
  oval 1.35x0.4 smd mask+0.076: 2(-2.95,2.275) 3(-2.95,1.625) 4(-2.95,0.975) 5(-2.95,0.325) 6(-2.95,-0.325) 7(-2.95,-0.975) 8(-2.95,-1.625) 9(-2.95,-2.275) 10(-2.95,-2.925) 11(2.95,-2.925) 12(2.95,-2.275) 13(2.95,-1.625) 14(2.95,-0.975) 15(2.95,-0.325) 16(2.95,0.325) 17(2.95,0.975) 18(2.95,1.625) 19(2.95,2.275) 20(2.95,2.925)
  silkscreen extent -3.02,-3.3 1.85,3.97, body extent -3.2,-3.3 3.2,3.3, height 1.2
SOT95P248X115-3N [mm] "SOT23, 3-Leads, Body 2.95x2.48mm, Pitch 0.95mm, IPC Medium Density"
  rect 0.95x0.6 smd: 1(-1,0.95) 2(-1,-0.95) 3(1,0)
  silkscreen extent -1.4,-1.55 0.71,1.9, body extent -1.25,-1.46 1.23,1.46, height 1.03
SOTFL50P160X60-6N [mm] "SOTFL, 6-Leads, Body 1.60x1.60mm, Pitch 0.50mm, IPC Medium Density"
  rect 0.45x0.325 smd mask+0.076: 1(-0.8,0.5)
  oval 0.6x0.25 smd mask+0.076: 2(-0.8,0) 5(0.8,0)
  oval 0.45x0.325 smd mask+0.076: 3(-0.8,-0.5) 4(0.8,-0.5) 6(0.8,0.5)
  silkscreen extent -1.87,-0.85 0.15,0.86, body extent -0.8,-0.8 0.8,0.8, height 0.57
TP_35M_DIA#1 [mil]
  round 35 smd mask+3: 1(0,0)
TP_35M_DIA#2 [mil]
  round 35 smd mask+3: 1(342.5,-313.58)
TP_35M_DIA#3 [mil]
  round 35 smd mask+3: 1(315,345)
TP_35M_DIA#4 [mil]
  round 35 smd mask+3: 1(400,-945)
TP_35M_DIA#5 [mil]
  round 35 smd mask+3: 1(-950,-400)

## Part data
5V A A1 A2 A3 A4 DGND GND M M+ M- N R VCC: library part EMS-TP35MIL-S, Internal Part Number=EMS-TP35MIL-S, Part Type="Test Point- 35mil"
C1 C6 C12 C15 C25 C26: library part ECA0U10K50V0-SC, Manufacturer="TDK Corporation", Manufacturer Part Number=CGA3E2X7R1H104K080AA, Temp Co=X7R, Vendor Part Number=445-5666-1-ND, 1st Auxiliary Field=50V, 2nd Auxiliary Field=±10%, 3rd Auxiliary Field="RoHS Compliant", Component Height (mm)=0.90mm, Internal Part Number=ECA0U10K50V0-SC, Part Type="CAP CER 0.1UF 50V X7R 0603", Vendor Name=Digi-Key
C2 C3: library part ECA1U00L25V0-SC, Manufacturer="TDK Corporation", Manufacturer Part Number=CGA3E1X7R1E105K080AE, Temp Co="-55°C ~ 125°C", Vendor Part Number=445-173628-1-ND, 1st Auxiliary Field=25V, 2nd Auxiliary Field=±10%, 3rd Auxiliary Field="RoHS Compliant", Component Height (mm)=0.95mm, Internal Part Number=ECA1U00L25V0-SC, Part Type="CAP CER 1UF 25V X7R 0603", Vendor Name=Digi-Key
C4 C5 C7 C8 C9 C10: library part ECA47N0L50V-SC, Manufacturer="TDK Corporation", Manufacturer Part Number=CGA3E2X7R1H473K080AA, Temp Co="-55°C ~ 125°C", Vendor Part Number=445-5664-1-ND, 1st Auxiliary Field=50V, 2nd Auxiliary Field=±10%, 3rd Auxiliary Field="RoHS Compliant", Component Height (mm)=0.9mm, Internal Part Number=ECA47N0L50V-SC, Part Type="CAP CER 0.047UF 50V X7R 0603", Vendor Name=Digi-Key
C11 C17 C18 C27 C28: library part ECA10U0L35V0-SG, Manufacturer="TDK Corporation", Manufacturer Part Number=CGA5L1X7R1V106K160AC, Temp Co="-55°C ~ 125°C", Vendor Part Number=445-174428-1-ND, 1st Auxiliary Field=35V, 2nd Auxiliary Field=±10%, 3rd Auxiliary Field="RoHS Compliant", 4th Auxiliary Field=AEC-Q200, Component Height (mm)=1.80mm, Internal Part Number=ECA10U0L35V0-SG, Part Type="CAP CER 10UF 35V X7R 1206", Vendor Name=Digi-Key
C13 C24: library part ECA0U022K50V0-SC, Manufacturer="TDK Corporation", Manufacturer Part Number=CGA3E2X7R1H223K080AA, Temp Co=X7R, Vendor Part Number=445-5663-1-ND, 1st Auxiliary Field=50V, 2nd Auxiliary Field=±10%, Component Height (mm)=0.90mm, Internal Part Number=ECA0U022K50V0-SC, Part Type="CAP CER 0.022UF 50V X7R 0603", Vendor Name=Digi-Key
C14 C16: library part ECA0U22L50V0-SC, Manufacturer="Murata Electronics North America", Manufacturer Part Number=GCJ188R71H224KA01D, Temp Co="-55°C ~ 125°C", Vendor Part Number=490-14410-1-ND, 1st Auxiliary Field=50V, 2nd Auxiliary Field=±10%, 3rd Auxiliary Field="RoHS Compliant", Component Height (mm)=0.90mm, Internal Part Number=ECA0U22L50V0-SC, Part Type="CAP CER 0.22UF 50V X7R 0603", Vendor Name=Digi-Key
C19: library part ECA47U0L16V0-SH, Manufacturer="Murata Electronics North America", Manufacturer Part Number=GRT32EC81C476KE13L, Temp Co="-55°C ~ 105°C", Vendor Part Number=490-12494-1-ND, 1st Auxiliary Field=16V, 2nd Auxiliary Field=±10%, 3rd Auxiliary Field="RoHS Compliant", 4th Auxiliary Field=AEC-Q200, Component Height (mm)=2.70mm, Internal Part Number=ECA47U0L16V0-SH, Part Type="CAP CER 47UF 16V X6S 1210", Vendor Name=Digi-Key
C20 C21 C22 C23: library part ECA0U01L50V0-SC, Manufacturer="TDK Corporation", Manufacturer Part Number=CGA3E2X8R1H103K080AA, Temp Co="-55°C ~ 150°C", Vendor Part Number=445-5892-1-ND, 1st Auxiliary Field=50V, 2nd Auxiliary Field=±10%, 3rd Auxiliary Field="RoHS Compliant", 4th Auxiliary Field=AEC-Q200, Component Height (mm)=0.80mm, Internal Part Number=ECA0U01L50V0-SC, Part Type="CAP CER 10000PF 50V X8R 0603", Vendor Name=Digi-Key
D1: library part EDDVS1A0040V0-S, Manufacturer="Vishay Semiconductor Diodes Division", Manufacturer Part Number=SS1FL4HM3/H, Temp Co="-55°C ~ 150°C", Vendor Part Number=SS1FL4HM3/HGICT-ND, 1st Auxiliary Field=40V, 2nd Auxiliary Field=1A, 3rd Auxiliary Field="RoHS Compliant", Component Height (mm)=1.08mm, Internal Part Number=EDDVS1A0040V0-S, Part Type="DIODE SCHOTTKY 40V 1A DO-219AB", Vendor Name=Digi-Key
D2 D3 D8 D9: library part EDDR0A1030V0-S, Manufacturer="Rohm Semiconductor", Manufacturer Part Number=RB501SM-30FHT2R, Temp Co="125°C (Max)", Vendor Part Number=RB501SM-30FHT2RCT-ND, 1st Auxiliary Field=30V, 2nd Auxiliary Field=100mA, 3rd Auxiliary Field="RoHS Compliant", Component Height (mm)=0.70mm, Internal Part Number=EDDR0A1030V0-S, Part Type="Diode Schottky 30V 100mA Surface Mount EMD2", Vendor Name=Digi-Key
D4 D5 D10 D11: library part EDDST9A005V00-S, Manufacturer=STMicroelectronics, Manufacturer Part Number=ESDALC5-1BT2Y, Temp Co="-50°C ~ 125°C (TJ)", Vendor Part Number=497-14998-1-ND, 1st Auxiliary Field=5V, 2nd Auxiliary Field=9A, 3rd Auxiliary Field="RoHS Compliant", 4th Auxiliary Field=AEC-Q101, Component Height (mm)=0.40mm, Internal Part Number=EDDST9A005V00-S, Part Type="TVS DIODE 5V 17.5V SOD882T", Vendor Name=Digi-Key
D6: library part EDDVS1A00150V-S, Manufacturer="Vishay Semiconductor Diodes Division", Manufacturer Part Number=V1PM15HM3/H, Temp Co="-40°C ~ 175°C", Vendor Part Number=V1PM15HM3/HGICT-ND, 1st Auxiliary Field=150V, 2nd Auxiliary Field=1A, 3rd Auxiliary Field="RoHS Compliant", 4th Auxiliary Field=AEC-Q101, Component Height (mm)=0.73mm, Internal Part Number=EDDVS1A00150V-S, Part Type="DIODE SCHOTTKY 150V 1A MICROSMP", Vendor Name=Digi-Key
D7: library part EDDST83A025V7-S, Manufacturer=STMicroelectronics, Manufacturer Part Number=SM6T27CAY, Temp Co="-55°C ~ 150°C (TJ)", Vendor Part Number=497-10798-1-ND, 1st Auxiliary Field=25.7V, 2nd Auxiliary Field=600W, 3rd Auxiliary Field="RoHS Compliant", Component Height (mm)=2.65mm, Internal Part Number=EDDST83A025V7-S, Part Type="TVS DIODE 23.1V 48.3V SMB", Vendor Name=Digi-Key
FB1 FB2 FB3 FB4 FB5 FB6 FB7: library part EIN600R1A00-SC, Manufacturer="Würth Elektronik", Manufacturer Part Number=782633601, Temp Co="-55°C ~ 125°C", Vendor Part Number=732-6703-1-ND, 1st Auxiliary Field=1A, 2nd Auxiliary Field="600 Ohms @ 100MHz", 3rd Auxiliary Field="ROHS3 Compliant", 4th Auxiliary Field=AEC-Q200, Component Height (mm)=1.00mm, Internal Part Number=EIN600R1A00-SC, Part Type="FERRITE BEAD 600 OHM 0603 1LN", Vendor Name=Digi-Key
FID1 FID2 FID3 FID4: library part FID_40X40
J1: library part "EMS-8.06.16 J-LINK 6-PIN NEEDLE ADAPTER", Manufacturer="Segger Microcontroller Systems", Manufacturer Part Number="8.06.16 J-LINK 6-PIN NEEDLE ADAPTER", Vendor Part Number=899-1051-ND, 1st Auxiliary Field=J-Link, 3rd Auxiliary Field="RoHS Compliant", Internal Part Number="EMS-8.06.16 J-LINK 6-PIN NEEDLE ADAPTER", Part Type="J-LINK 6-PIN NEEDLE ADAPTER", Vendor Name=Digi-Key
J3: library part ECN-M20-9950345-0003-0060, Manufacturer="Harwin Inc.", Manufacturer Part Number=M20-9950345, Temp Co="-40°C ~ 105°C", Vendor Part Number=952-2092-ND, 1st Auxiliary Field=6pos, 2nd Auxiliary Field="2 rows", 3rd Auxiliary Field="RoHS Compliant", Component Height (mm)=5.08mm, Internal Part Number=ECN-M20-9950345-0003-0060, Part Type="CONN HEADER R/A 6POS 2.54MM", Vendor Name=Digi-Key
L1: library part EIN47U0N950M-S, Manufacturer="Taiyo Yuden", Manufacturer Part Number=NRS5030T470MMGJV, Temp Co="-40°C ~ 125°C", Vendor Part Number=587-3604-1-ND, 1st Auxiliary Field=950mA, 2nd Auxiliary Field=±20%, 3rd Auxiliary Field="RoHS Compliant", 4th Auxiliary Field=AEC-Q200, Component Height (mm)=3.00mm, Internal Part Number=EIN47U0N950M-S, Part Type="FIXED IND 47UH 700MA 422.5 MOHM", Vendor Name=Digi-Key
L2: library part EIN330U300M-S, Manufacturer="Würth Elektronik", Manufacturer Part Number=744212331, Temp Co="-40°C ~ 105°C", Vendor Part Number=732-3939-1-ND, 1st Auxiliary Field=300mA, 2nd Auxiliary Field="330µH @ 100kHz", 3rd Auxiliary Field="ROHS3 Compliant", Component Height (mm)=1.8mm, Internal Part Number=EIN330U300M-S, Part Type="CMC 330UH 300MA 2LN 2 KOHM SMD", Vendor Name=Digi-Key
R1 R2 R7 R8 R11 R12: library part ERE100RG120-SE, Manufacturer="Panasonic Electronic Components", Manufacturer Part Number=ERJ-P06F1000V, Temp Co="-55°C ~ 155°C", Vendor Part Number=P16057CT-ND, 1st Auxiliary Field=0.5W, 2nd Auxiliary Field=±1%, 3rd Auxiliary Field="RoHS Compliant", 4th Auxiliary Field=AEC-Q200, Component Height (mm)=0.70mm, Internal Part Number=ERE100RG120-SE, Part Type="RES SMD 100 OHM 1% 1/2W 0805", Vendor Name=Digi-Key
R3 R4 R9 R10 R13 R14: library part ERE1K20G102-SE, Manufacturer="Panasonic Electronic Components", Manufacturer Part Number=ERJ-P06J122V, Temp Co="-55°C ~ 155°C", Vendor Part Number=P1.2KADCT-ND, 1st Auxiliary Field=0.5W, 2nd Auxiliary Field=±5%, 3rd Auxiliary Field="RoHS Compliant", Component Height (mm)=0.70mm, Internal Part Number=ERE1K20G102-SE, Part Type="RES SMD 1.2K OHM 5% 1/2W 0805", Vendor Name=Digi-Key
R5: library part ERE47K0G110-SC, Manufacturer=Yageo, Manufacturer Part Number=AT0603FRE0747KL, Temp Co="-55°C ~ 155°C", Vendor Part Number=YAG2129CT-ND, 1st Auxiliary Field=0.1W, 2nd Auxiliary Field=±1%, 3rd Auxiliary Field="RoHS Compliant", Component Height (mm)=0.55mm, Internal Part Number=ERE47K0G110-SC, Part Type="RES SMD 47K OHM 1% 1/10W 0603", Vendor Name=Digi-Key
R6: library part ERE0R00110-SC, Manufacturer="Panasonic Electronic Components", Manufacturer Part Number=ERJ-3GEY0R00V, Vendor Part Number=P0.0GCT-ND, 1st Auxiliary Field=0.1W, 2nd Auxiliary Field=Jumper, Component Height (mm)=0.55mm, Internal Part Number=ERE0R00110-SC, Part Type="RES SMD 0.0OHM JUMPER 1/10W 0603", Vendor Name=Digi-Key
R15: library part ERE1M00K110-SC, Manufacturer="Vishay Dale", Manufacturer Part Number=RCA06031M00JNEA, Temp Co="-55°C ~ 155°C", Vendor Part Number=541-2216-1-ND, 1st Auxiliary Field=0.1W, 2nd Auxiliary Field=±5%, 3rd Auxiliary Field="RoHS Compliant", 4th Auxiliary Field=AEC-Q200, Component Height (mm)=0.50mm, Internal Part Number=ERE1M00K110-SC, Part Type="RES SMD 1M OHM 5% 1/10W 0603", Vendor Name=Digi-Key
R16: library part ERE22K0G110-SC, Manufacturer="Panasonic Electronic Components", Manufacturer Part Number=ERJ-3EKF2202V, Temp Co="-55°C ~ 155°C", Vendor Part Number=P22.0KHCT-ND, 1st Auxiliary Field=0.1W, 2nd Auxiliary Field=±1%, 3rd Auxiliary Field="RoHS Compliant", 4th Auxiliary Field=AEC-Q200, Component Height (mm)=0.55mm, Internal Part Number=ERE22K0G110-SC, Part Type="RES SMD 22K OHM 1% 1/10W 0603", Vendor Name=Digi-Key
R17 R18 R23 R24: library part ERE105RG110-SC, Manufacturer="Panasonic Electronic Components", Manufacturer Part Number=ERJ-3EKF1050V, Temp Co="-55°C ~ 155°C", Vendor Part Number=P105HCT-ND, 1st Auxiliary Field=0.1W, 2nd Auxiliary Field=±1%, 3rd Auxiliary Field="RoHS Compliant", 4th Auxiliary Field=AEC-Q200, Component Height (mm)=0.55mm, Internal Part Number=ERE105RG110-SC, Part Type="RES SMD 105 OHM 1% 1/10W 0603", Vendor Name=Digi-Key
R19 R20 R25 R26: library part ERE210RG110-SC, Manufacturer="Panasonic Electronic Components", Manufacturer Part Number=ERJ-3EKF2100V, Temp Co="-55°C ~ 155°C", Vendor Part Number=P210HCT-ND, 1st Auxiliary Field=0.1W, 2nd Auxiliary Field=±1%, 3rd Auxiliary Field="RoHS Compliant", 4th Auxiliary Field=AEC-Q200, Component Height (mm)=0.55mm, Internal Part Number=ERE210RG110-SC, Part Type="RES SMD 210 OHM 1% 1/10W 0603", Vendor Name=Digi-Key
R27 R28: library part ERE10K0K110-SB, Manufacturer="Panasonic Electronic Components", Manufacturer Part Number=ERJ-2GEJ103X, Temp Co=±200ppm/°C, Vendor Part Number=P10KJCT-ND, 1st Auxiliary Field=0.1W, 2nd Auxiliary Field=±5%, 3rd Auxiliary Field="RoHS Compliant", Component Height (mm)=0.40mm, Internal Part Number=ERE10K0K110-SB, Part Type="RES SMD 10K OHM 5% 1/10W 0402", Vendor Name=Digi-Key
R29 R30: library part ERE4K70G110-SB, Alternate Part number=RK73H1ETTP4701F, Manufacturer="Panasonic Electronic Components", Manufacturer Part Number=ERJ-2RKF4701X, Temp Co=±100ppm/°C, Vendor Part Number=P4.70KLCT-ND, 1st Auxiliary Field=0.1W, 2nd Auxiliary Field=±1%, 3rd Auxiliary Field="RoHS Compliant", 4th Auxiliary Field=AEC-Q200, Component Height (mm)=0.40mm, Internal Part Number=ERE4K70G110-SB, Part Type="RES SMD 4.7K OHM 1% 1/10W 0402", Vendor Name=Digi-Key
U1: library part EICSTMTSSOP-20-1691, Manufacturer=STMicroelectronics, Manufacturer Part Number=STM8AF6223PCU, Temp Co="-40°C ~ 125°C (TA)", Vendor Part Number=497-17896-ND, 1st Auxiliary Field="3V ~ 5.5V", 2nd Auxiliary Field=8-Bit, 3rd Auxiliary Field="RoHS Compliant", Component Height (mm)=1.2mm, Internal Part Number=EICSTMTSSOP-20-1691, Part Type="IC MCU 8BIT 8KB FLASH 20TSSOP", Vendor Name=Digi-Key
U2 U3 U4 U5 U6 U7: library part EICITSOT23-3-1528, Manufacturer="Infineon Technologies", Manufacturer Part Number=TLE49641MXTSA1, Temp Co="-40°C ~ 170°C (TJ)", Vendor Part Number=TLE49641MXTSA1CT-ND, 1st Auxiliary Field="3 V ~ 32 V", 2nd Auxiliary Field=2.5mA, 3rd Auxiliary Field="RoHS Compliant", Component Height (mm)=1.15mm, Internal Part Number=EICITSOT23-3-1528, Part Type="MAGNETIC SWITCH UNIPOLAR SOT23-3", Vendor Name=Digi-Key
U8: library part EICITSOIC-08-0001, Manufacturer="Infineon Technologies", Manufacturer Part Number=TLE8366EV50XUMA1, Temp Co="-40°C ~ 150°C (TJ)", Vendor Part Number=TLE8366EV50XUMA1CT-ND, 1st Auxiliary Field=45V, 2nd Auxiliary Field=1.8A, 3rd Auxiliary Field="RoHS Compliant", 4th Auxiliary Field=AEC-Q100, Component Height (mm)=1.7mm, Internal Part Number=EICITSOIC-08-0001, Part Type="IC REG BUCK 5V 1.8A 8DSO", Vendor Name=Digi-Key
U9 U10: library part EICNUSOT666-06-0004, Manufacturer="Nexperia USA Inc.", Manufacturer Part Number=PMDT670UPE,115, Temp Co="-55°C ~ 150°C (TJ)", Vendor Part Number=1727-1334-1-ND, 1st Auxiliary Field=20V, 2nd Auxiliary Field=550mA, 3rd Auxiliary Field="RoHS Compliant", 4th Auxiliary Field=AEC-Q101, Component Height (mm)=0.6mm, Internal Part Number=EICNUSOT666-06-0004, Part Type="MOSFET 2P-CH 20V 0.55A SOT666", Vendor Name=Digi-Key

## Free pads (board coordinates)
  round 4 hole 118.11 unplated: MH(108.27,108.27) MH(1328.74,1407.48)
  round 4 hole 94.49 unplated: MH(108.27,1407.48) MH(1328.74,108.27)

## Via types
v1: diameter 24, hole 12, Top Layer to Bottom Layer, tented both sides, 128 vias
v2: diameter 20, hole 10, Top Layer to Bottom Layer, tented both sides, 22 vias

## Nets (pads, with @x,y where several pads share a name; then routed paths per layer and width w, separated by ;. In a path a pad name is that pad's centre, name@x,y a point inside that pad or via, vN(x,y) a via of type N, cw(c..) or ccw(c..) an arc to the next point about the centre after c; other vN are vias at no path point)
AUTOMATIC: A.1 R13.2 U1.19 U6.2 | length 696
  Top Layer w8: U6.2@516.54,696.46 515.43,697.56 R13.2@515.43,778 558,778 v2(559,779)
  Bottom Layer w8: v2(559,779) 594,779 A.1@595,780 626.77,780 667.77,821 736,821 820,905 984,905 1019.43,869.57 U1.19@1019.43,826.86
DEBUG: R29.1 R30.2 U1.17 | length 359.9
  Bottom Layer w8: U1.17@1070.61,826.86 1070.61,890.61 1108,928 R29.1@1291.28,928 R30.2@1291.28,988
DGND: C17.1 C27.1 D7.1 DGND.1 FB7.1 J3.1 L2.3 | length 142.6
  Bottom Layer w25: v1(114,326) 120.39,319.61 L2.3@180.65,319.61 ; v1(114,377) 129.9,392.9 FB7.1@180.67,392.9
  other v1: 651.5,21.5 751.5,21.5 851.5,21.5 300,59.37 345,59.37 390,59.37 76,300 40,328 41,377 77,396
GND: C1.2 C2.1 C3.2 C4.1 C5.1 C6.2 C7.1 C8.1 C9.1 C10.1 C11.1 C12.2 C14.1 C15.2 C18.1 C19.1 C20.1 C21.1 C22.1 C23.1 C24.2 C25.2 C26.2 C28.1 D1.1 D4.1 D5.1 D10.1 D11.1 FB7.2 GND.1 J1.1 L2.4 R16.1 R19.2 R20.2 R25.2 R26.2 R30.1 U1.7 U2.3 U3.3 U4.3 U5.3 U6.3 U7.3 U8.1 U8.2 U8.9 | length 2762.2
  Top Layer w12: v1(673,650) 673,654.5 C26.2@706,687.5 ; v1(797,693) 797,659.3 U4.3@797.24,659.05
  Top Layer w15: U7.3@162.21,1015.75 v1(204.25,1015.75) ; C10.1@315,1041.5 317.5,1041.5 v1(351,1075) ; v1(414,1090) 414,1055.51 411.24,1052.76 U5.3@414.57,1052.76 ; U6.3@438,658.85 U6.3@437.79,659.06 v1(474.06,659.06) ; C8.1@553,1078.5 603,1078.5 613.09,1088.58 U3.3@658.66,1088.58 v1(696.42,1088.58) ; v1(570,295) 600.69,295 603,292.69 D4.1@603.31,293 ; v1(685,295) 717.47,295 D10.1@719.47,293 ; v1(807,293) D5.1@835.63,293 ; C5.1@824.5,975 C5.1@822.5,977 v1(865,977) ; D11.1@951.78,293 951.78,256.22 v1(952,256) ; C7.1@956,684.5 v1(956,724)
  Top Layer w20: v1(415,550) C9.1@453.5,550 ; C20.1@639,418.5 v1(676.5,456) ; v1(703,364) 703,385 723.98,405.98 C22.1@757.5,405.98 ; v1(863,373) 891.98,401.98 C21.1@910.48,401.98 ; v1(962,1100) 980.31,1081.69 C6.2@1011.5,1081.69 ; C23.1@1053,355.5 v1(1111.5,355.5) ; v1(1118,660) 1154.57,660 U2.3@1155.51,659.06 ; v2(1179,446) C25.2@1179,483.5 ; C4.1@1361.5,620 v1(1395,620)
  Bottom Layer w12: v1(512,1464) 513,1463 C14.1@513,1419.69 ; v1(673,650) 673,637 685.5,624.5 R25.2@717,624.5 ; C15.2@725,1416.5 v1@725,1459 ; C3.2@1131,1190.5 v1(1131,1231) ; v1(1147,998) 1147,1058.76 U1.7@1147.39,1059.14 ; C1.2@1198,1191.5 v1(1198,1233) ; v1(1231.5,1227) C2.1@1267,1191.5
  Bottom Layer w15: U8.1@156.72,754 U8.2@156.72,804 ; v1(576,669) 576,625 R19.2@576.5,624.5 ; v1(797,693) 797,686.5 R20.2@859,624.5 ; J1.1@910,1375 v1(910,1422) ; v1(960,573) 960,616.57 967.93,624.5 R26.2@1006.49,624.5 ; R30.1@1326.72,988 v1(1359,988)
  Bottom Layer w20: v1(38.5,976.5) C24.2@80,976.5 ; v1(50,560) 80,590 R16.1@80,646.5 R16.1@80,653.5 ; v1(115,460) 119.9,455.1 FB7.2@180.67,455.1 ; v1(115,510) 125.39,520.39 L2.4@180.65,520.39 ; U8.2@156.72,804 239,804 v1(264,829) ; C11.1@158.01,603 158.01,586.99 180.65,564.35 L2.4@180.65,520.39 ; FB7.2@180.67,455.1 L2.4@180.65,520.39 ; v1@248,723 v1(248,728) ; v1@252,719 264.5,719 C12.2@303.5,680
  Bottom Layer w24: v1(331,1250) C19.1@387.01,1250
  Bottom Layer w40: v1(248,728) 264,744 v1(264,829) 257.91,835.09 D1.1@257.91,997 D1.1@257.91,1005
  other v1: 984,49 953.26,166 1034,179 952.63,211 1104,232 1209,284 539,362 1306,366 1373,377 1374,448 817,453 50,460 50,510 115,560 1402,695 197,714 584,733 231.42,788 295.42,788 230,865 295,865 1353,1060 287.91,1093.91 47.72,1111.28 47.72,1161.28 317,1182 47.72,1211.28 1117,1277 1123,1337 350,1421 463,1421 568,1421 674,1421 776,1421 1049,1458 968,1459 887,1460 806,1461 674,1462 725,1462 593,1463 432,1464 351,1465
M+: M+.1 R4.2 U1.1 U3.2 | length 304.5
  Top Layer w8: U3.2@737.4,1125.98 814.45,1125.98 R4.2@815,1125.43 v1(864.43,1125.43)
  Bottom Layer w8: v1(864.43,1125.43) 910.43,1125.43 M+.1@911,1124.87 ; M+.1@911,1126 M+.1@911,1124.87 ; U1.1@993.84,1059.14 943.86,1059.14 911,1092 M+.1@911,1124.87
M-: M-.1 R14.2 U1.20 U7.2 | length 1269.7
  Top Layer w8: U7.2@240.95,1053.15 240.43,1053.66 R14.2@240.43,1122 240.43,1188.43 269,1217 878,1217 908,1187 v2(908,876)
  Bottom Layer w8: v2(908,876) M-.1@908,833 914.14,826.86 U1.20@993.84,826.86
MANUAL: M.1 R10.2 U1.10 U5.2 | length 1120.1
  Top Layer w8: U5.2@493.31,1090.16 494.43,1091.28 R10.2@494.43,1160 545,1160 574,1189 v2(784,1189)
  Bottom Layer w8: v2(784,1189) M.1@784,1145 784,986 824,946 1182,946 1224.16,988.16 U1.10@1224.16,1059.14
NetC3_1: C3.1 U1.8 | length 85.7
  Bottom Layer w10: C3.1@1131,1127.5 1172.98,1085.53 U1.8@1172.98,1059.14
NetC4_2: C4.2 R1.2 U2.1 | length 146.6
  Top Layer w20: U2.1@1234.25,621.65 1296.85,621.65 C4.2@1298.5,620 1294.57,616.06 R1.2@1294.57,540
NetC5_2: C5.2 R2.2 U3.1 | length 156.4
  Top Layer w20: U3.1@737.4,1051.18 737.4,999.1 C5.2@759.5,977 R2.2@759.43,904 R2.2@759.43,904
NetC7_2: C7.2 R7.2 U4.1 | length 152.1
  Top Layer w20: U4.1@875.98,621.65 955.85,621.65 C7.2@956,621.5 956.06,621.57 R7.2@1028,621.57
NetC8_2: C8.2 R8.2 U5.1 | length 172.3
  Top Layer w20: U5.1@493.31,1015.35 552.85,1015.35 C8.2@553,1015.5 553,906.43 R8.2@550.57,904
NetC9_2: C9.2 R11.2 U6.1 | length 148.3
  Top Layer w20: U6.1@516.54,621.65 516.54,550.04 C9.2@516.5,550 520.43,546.06 R11.2@520.43,475
NetC10_2: C10.2 R12.2 U7.1 | length 260.8
  Top Layer w20: R12.2@185.43,900 185.43,904.31 279.31,904.31 314.84,939.84 314.84,978.35 U7.1@240.95,978.35
NetC13_1: C13.1 C24.1 U8.3 | length 139.8
  Bottom Layer w20: C24.1@80,913.5 C13.1@80,853.5 80,851.5 82.5,854 U8.3@156.72,854
NetC13_2: C13.2 R16.2 | length 74
  Bottom Layer w20: R16.2@80,716.5 C13.2@80,790.5
NetC14_2: C14.2 C19.2 FB1.1 L1.2 U8.4 | length 683.6
  Bottom Layer w24: U8.4@156.72,904 156.72,1142.72 370.7,1356.7 C14.2@513,1356.7
NetC16_1: C16.1 U8.5 | length 87.6
  Bottom Layer w15: U8.5@371.28,904 457.5,904 C16.1@458.5,905
NetC16_2: C16.2 D1.2 L1.1 U8.6 | length 294.8
  Bottom Layer w40: D1.2@372.09,997 553.93,997 L1.1@555,995.93 555,924.61 535.39,905 C16.2@523,905
NetC17_2: C17.2 C27.2 D6.1 FB2.1 L2.1 | length 479.9
  Top Layer w40: C27.2@283.98,358.39 363.39,358.39 v1(375,370) ; v1(375,280) 380.37,274.63 C17.2@380.37,228.99 501.07,228.99 D6.1@504.68,225.38
  Bottom Layer w30: v1@369.61,319.61 v1(375,325)
  Bottom Layer w40: FB2.1@278.01,393.9 351.1,393.9 v1(375,370) ; L2.1@279.08,319.61 v1@369.61,319.61
  other v1: 421,303
NetD2_1: D2.1 R17.1 | length 57.4
  Bottom Layer w8: D2.1@639.5,554.54 640,554.04 R17.1@640,498
  Bottom Layer w15: R17.1@639.5,498.5 R17.1@640,498
NetD2_2: D2.2 U9.3 | length 171.8
  Bottom Layer w8: D2.2@639.5,621.46 639.5,644.5 618,666 618,719.46 650.23,751.68 U9.3@669.5,751.68
NetD3_1: D3.1 R18.1 | length 56.4
  Bottom Layer w8: R18.1@923.51,498 D3.1@923.51,554.04
  Bottom Layer w15: D3.1@923.28,554.53 D3.1@923.51,554.31
NetD3_2: D3.2 U10.3 | length 373.3
  Bottom Layer w8: D3.2@923.28,621.46 923.28,654.51 958.77,690 1051.23,690 1126,615.23 1126,565.02 1143.34,547.69 U10.3@1160.5,547.69
NetD6_2: D6.2 D7.2 J3.3 VCC.1 | length 149.7
  Bottom Layer w20: D7.2@515.08,154.37 515.08,302.08 VCC.1@516,303 ; J3.3@652.5,202.5 J3.3@653,203
  other v1: 467,76.37 519,76.37 577,76.37
NetD8_1: D8.1 R23.1 | length 56.4
  Bottom Layer w8: R23.1@781.51,498 D8.1@781.51,554.04
  Bottom Layer w15: D8.1@781.28,554.53 D8.1@781.51,554.31
NetD8_2: D8.2 U9.6 | length 111.1
  Bottom Layer w8: U9.6@732.5,712.31 732.5,692.5 781.28,643.72 D8.2@781.28,621.46
NetD9_1: D9.1 R24.1 | length 56.7
  Bottom Layer w8: R24.1@1069.5,497 D9.1@1069.5,553.04
  Bottom Layer w15: D9.1@1069,554.54 D9.1@1069.5,554.04
NetD9_2: D9.2 U10.6 | length 309.5
  Bottom Layer w8: D9.2@1069,621.46 1094.31,621.46 1105,610.77 1105,490 1115,480 1219,480 1223.5,484.5 U10.6@1223.5,508.32
NetFB3_1: FB3.1 R24.2 R26.1 | length 145.5
  Bottom Layer w8: R24.2@1006.5,497 R26.1@1006.49,561.5 ; FB3.1@1006.88,416 R24.2@1006.88,497
NetFB4_1: FB4.1 R18.2 R20.1 | length 139.3
  Bottom Layer w8: R20.1@859,561.5 860.52,559.98 R18.2@860.52,498 860.9,497.62 FB4.1@860.9,423
NetFB5_1: FB5.1 R23.2 R25.1 | length 146.3
  Bottom Layer w8: R25.1@717,561.5 718.52,559.98 R23.2@718.52,498 718.9,497.62 FB5.1@718.9,416
NetFB6_1: FB6.1 R17.2 R19.1 | length 146.1
  Bottom Layer w8: R19.1@576.5,561.5 577.01,561 R17.2@577.01,498 577.9,497.11 FB6.1@577.9,416
NetJ1_5: J1.5 R6.1 | length 293.9
  Top Layer w8: v1(1010,1410) 1010,1153.2 R6.1@1011.5,1151.69
  Bottom Layer w8: J1.5@1010,1375 v1(1010,1410)
NetR15_1: R15.1 U8.7 | length 185.7
  Bottom Layer w15: U8.7@371.28,804 502,804 516.5,789.5 R15.1@516.5,755
NEUTRAL: N.1 R9.2 U1.16 U4.2 | length 341.3
  Top Layer w8: U4.2@875.98,696.46 875.98,769.45 R9.2@875.43,770 v1(912,770)
  Bottom Layer w8: v1(912,770) N.1@953,770 1079,770 1096.2,787.2 U1.16@1096.2,826.86
nRESET: C6.1 R5.1 R6.2 U1.4 | length 297.5
  Top Layer w8: R6.2@1074.5,1151.69 C6.1@1074.5,1081.69 R5.1@1074.5,1011.69 1074.5,1010.5 v2(1112,973)
  Bottom Layer w8: U1.4@1070.61,1059.14 1070.61,1014.39 v2(1112,973)
REVERSE: R3.2 R.1 U1.13 U2.2 | length 527.5
  Top Layer w8: v2(1162,902) 1165.57,905.57 1261.43,905.57 1291.57,875.43 R3.2@1291.57,753 ; U2.2@1234.25,696.46 1272.46,696.46 1291.57,715.57 R3.2@1291.57,753 ; v2(1252,753) R3.2@1291.57,753
  Bottom Layer w8: v2(1162,902) 1172.98,891.02 U1.13@1172.98,826.86 ; v2(1252,753) R.1@1291.57,753
S1: U1.14 U10.2 | length 378.7
  Top Layer w8: v2(1129,528) 1080,577 1080,705 v2(1147,772)
  Bottom Layer w8: v2(1129,528) 1129.32,528.32 U10.2@1160.5,528.32 ; v2(1147,772) 1147,826.47 U1.14@1147.39,826.86
S2: R27.1 U1.11 U10.5 | length 408.8
  Bottom Layer w8: U10.5@1223.5,528 1243,528 1258,543 1258,710 1224.16,743.84 U1.11@1224.16,826.86 1251.14,826.86 1261,817 R27.1@1290.28,817